# EAGLE board SparkFun Buck Regulator - AP63203-Panel (EAGLE 9.5.2), part 1 of 3
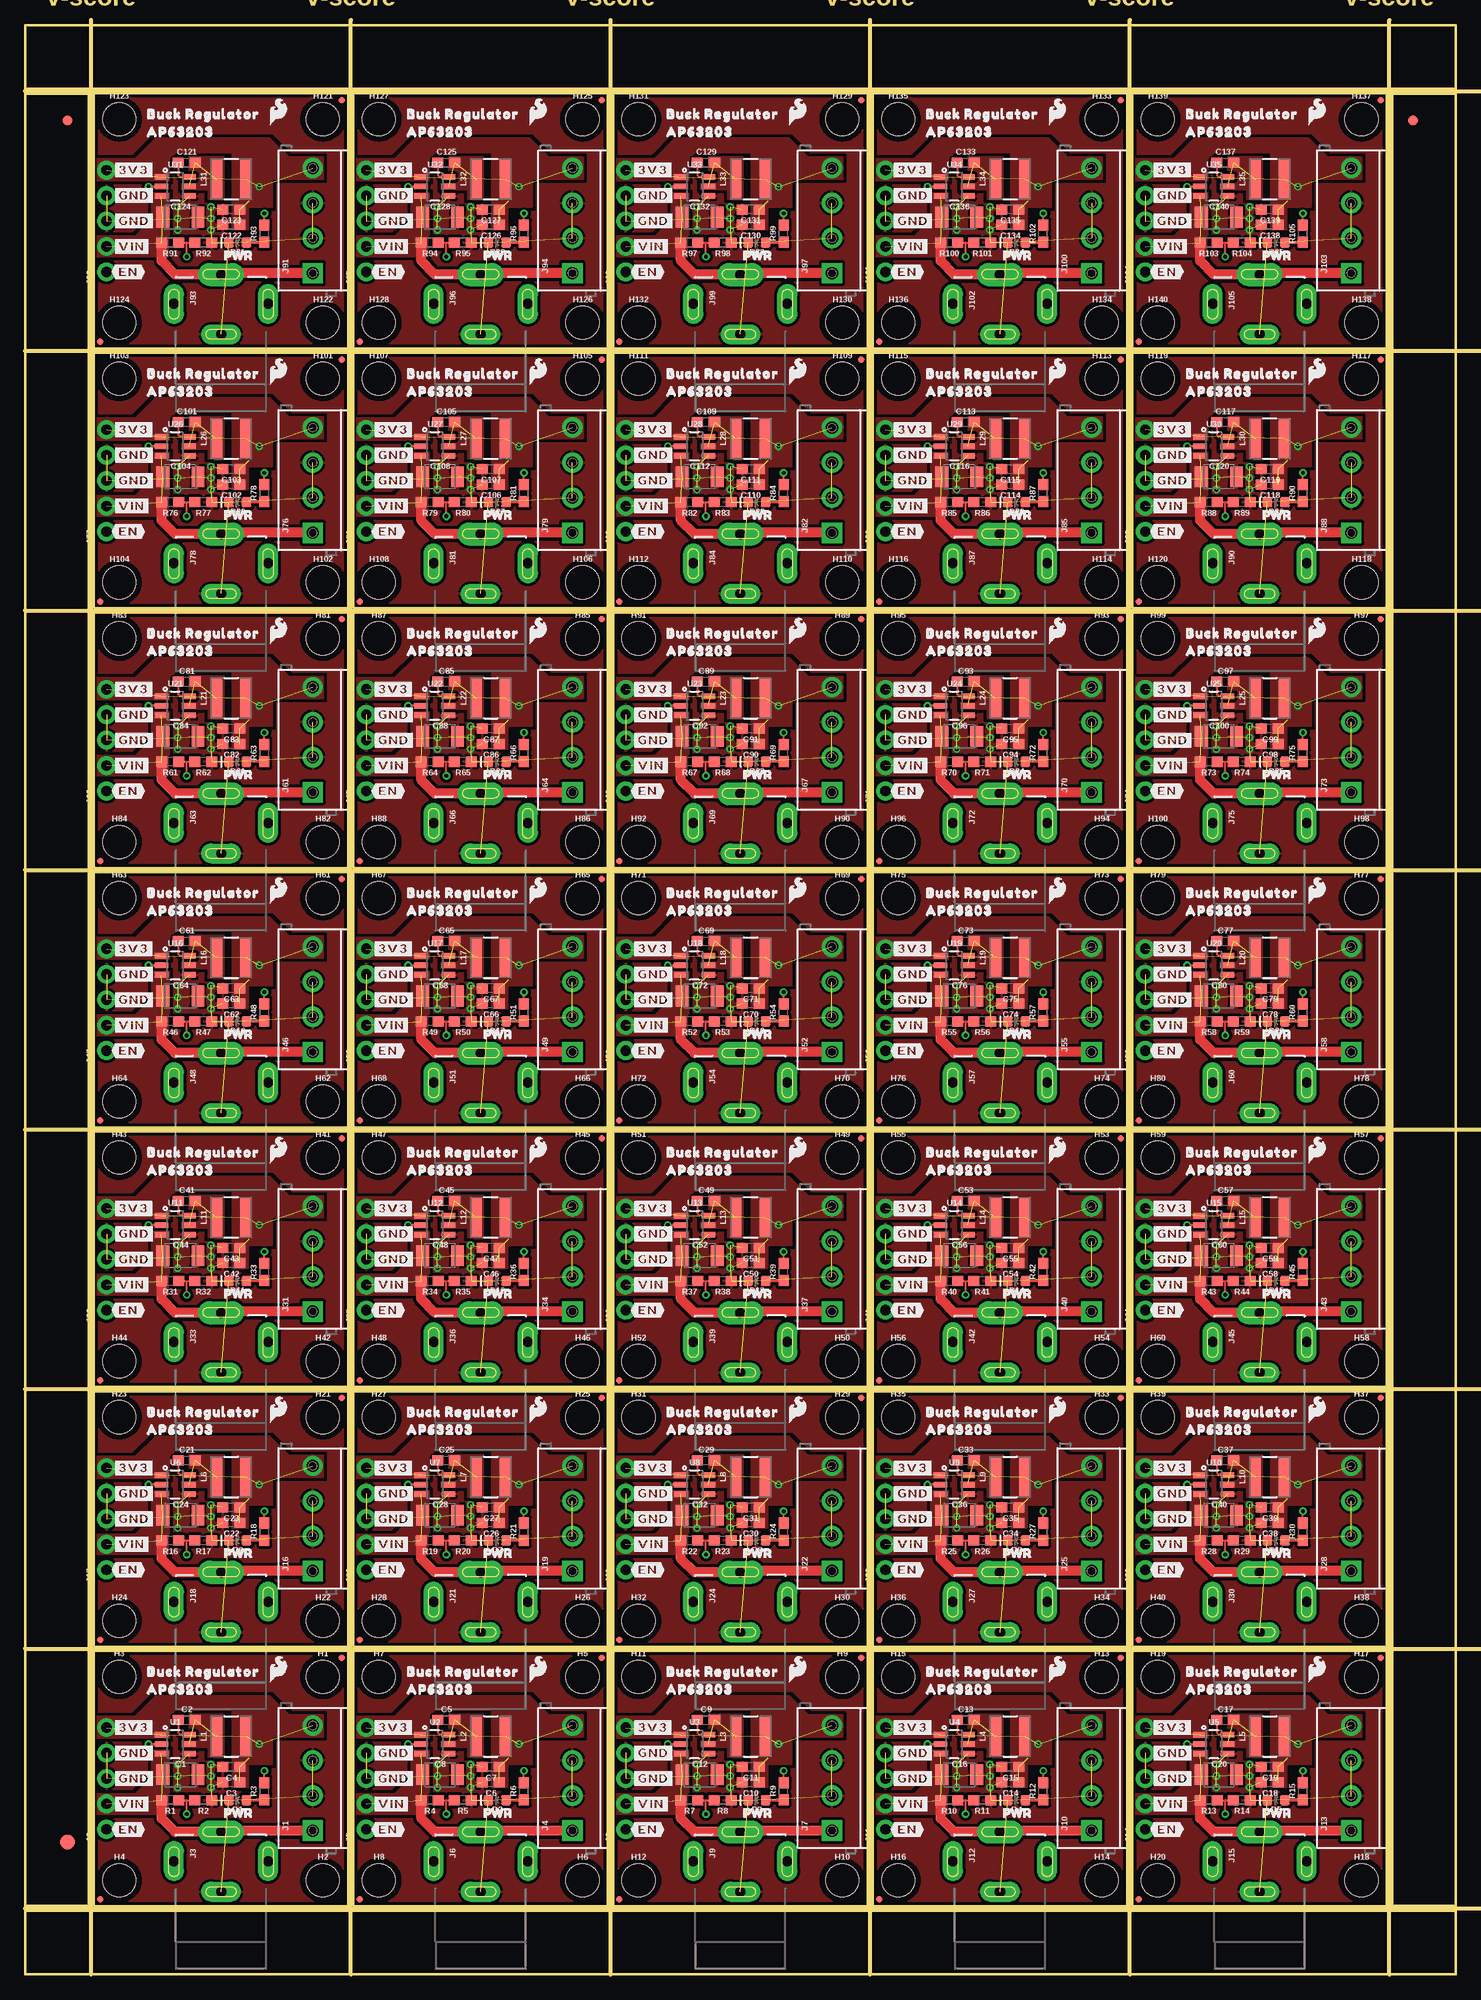
[diagram p0: board, top side]
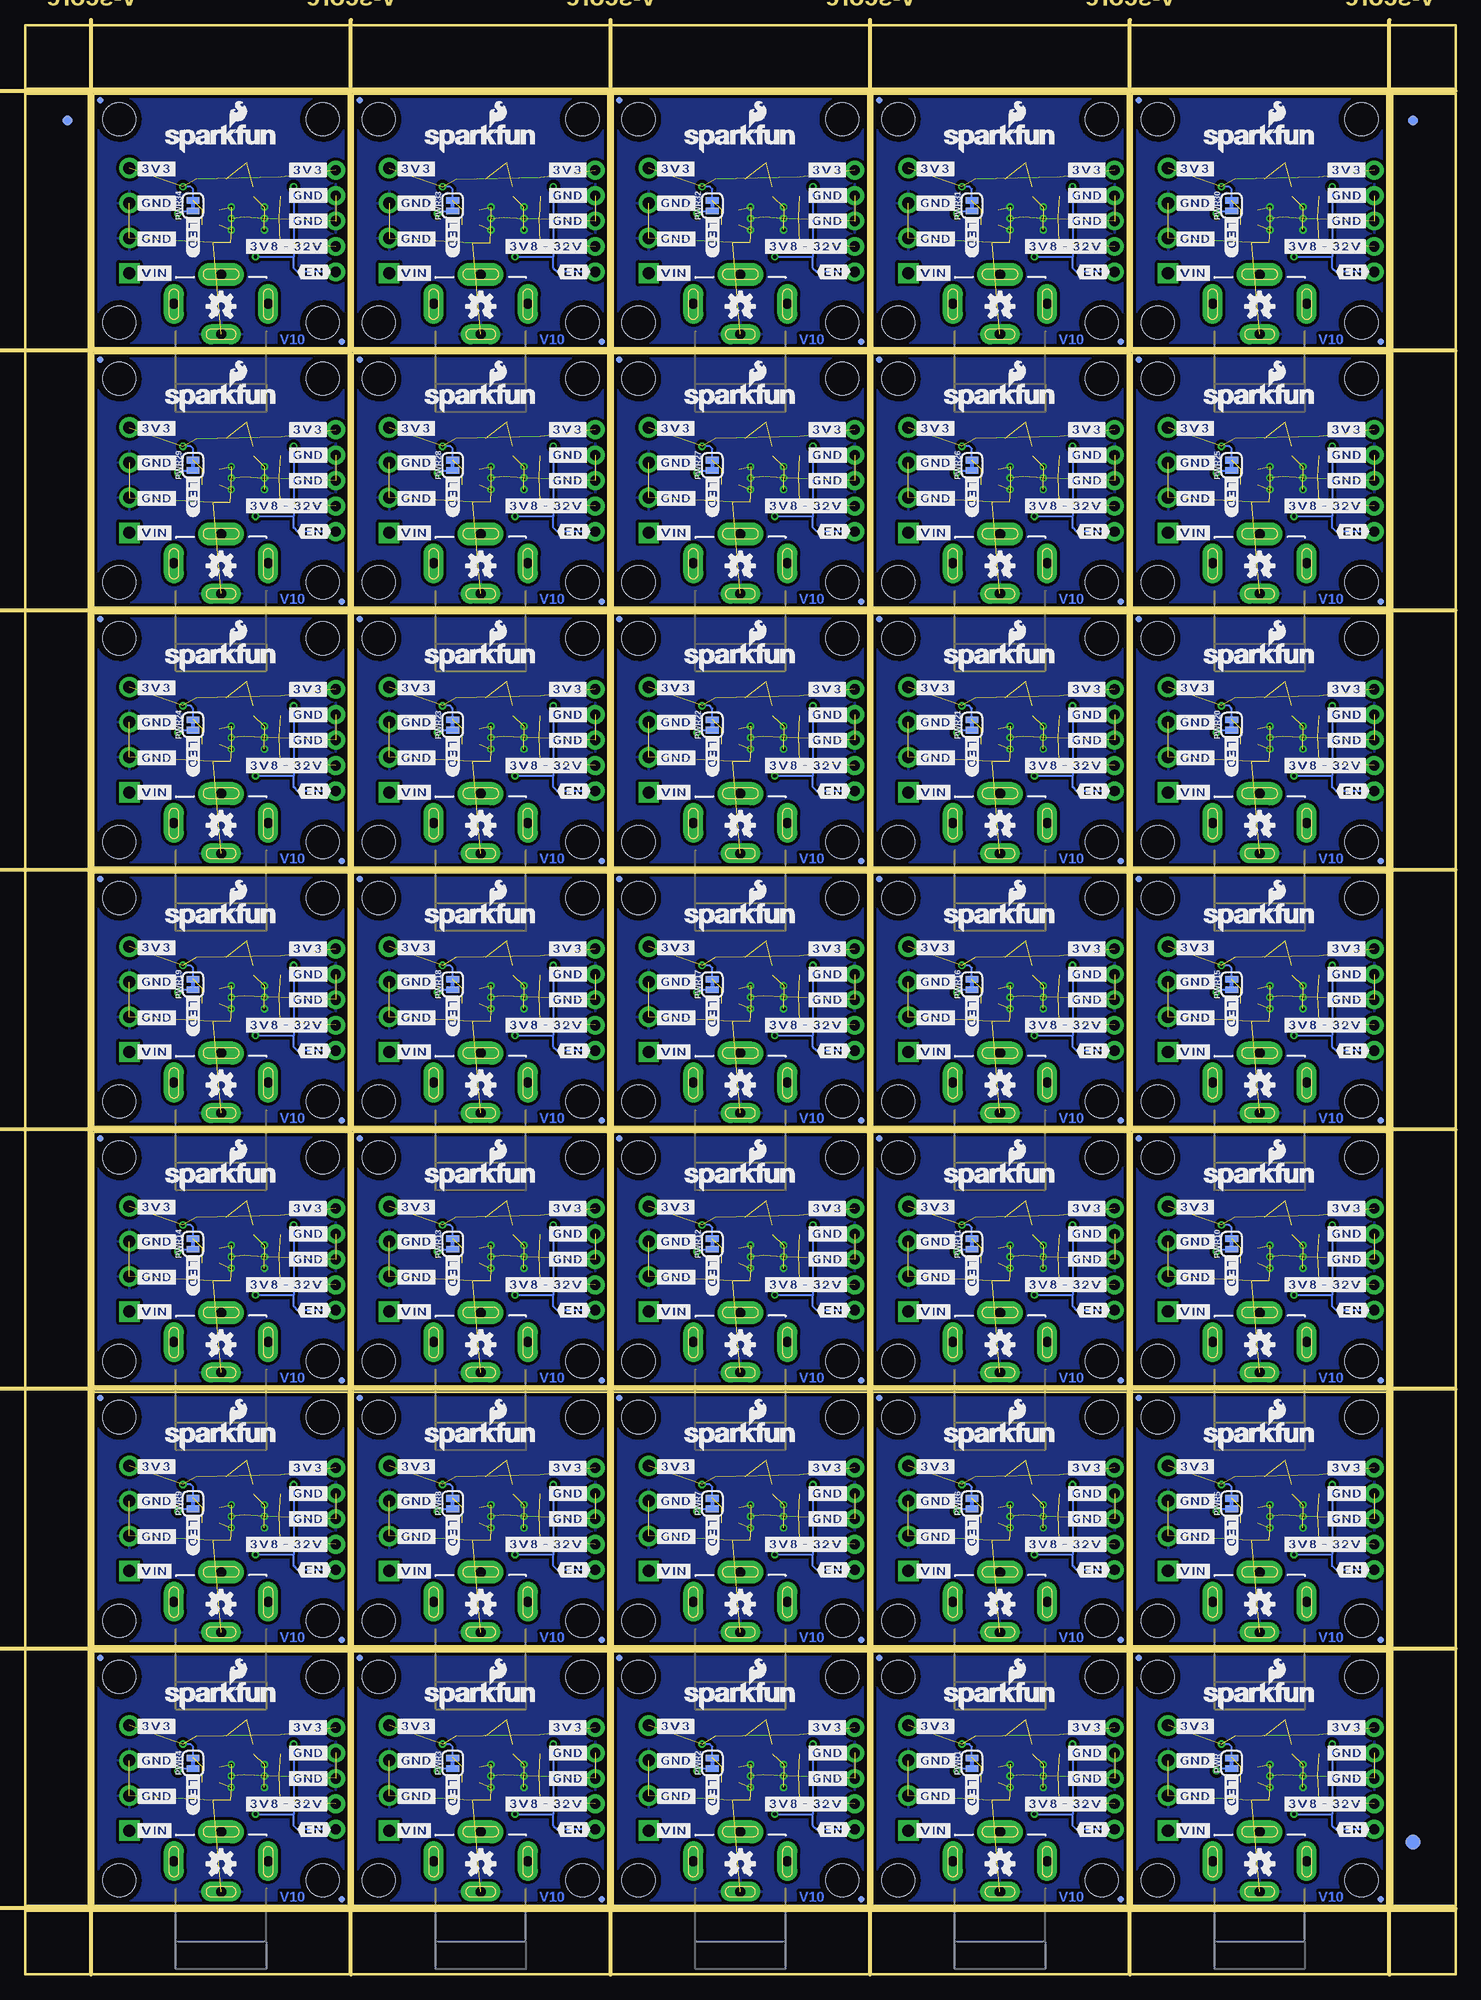
[diagram p1: board, bottom side, seen from below]

Size 142.75 x 194.56 mm. Coordinates in mm from the lower left corner, seen from the top.
Outline: 6.86,6.86 32.26,6.86 32.26,32.26 6.86,32.26 6.86,6.86
Outline: 32.77,6.86 58.17,6.86 58.17,32.26 32.77,32.26 32.77,6.86
Outline: 58.67,6.86 84.07,6.86 84.07,32.26 58.67,32.26 58.67,6.86
Outline: 84.58,6.86 109.98,6.86 109.98,32.26 84.58,32.26 84.58,6.86
Outline: 110.49,6.86 135.89,6.86 135.89,32.26 110.49,32.26 110.49,6.86
Outline: 6.86,32.77 32.26,32.77 32.26,58.17 6.86,58.17 6.86,32.77
Outline: 32.77,32.77 58.17,32.77 58.17,58.17 32.77,58.17 32.77,32.77
Outline: 58.67,32.77 84.07,32.77 84.07,58.17 58.67,58.17 58.67,32.77
Outline: 84.58,32.77 109.98,32.77 109.98,58.17 84.58,58.17 84.58,32.77
Outline: 110.49,32.77 135.89,32.77 135.89,58.17 110.49,58.17 110.49,32.77
Outline: 6.86,58.67 32.26,58.67 32.26,84.07 6.86,84.07 6.86,58.67
Outline: 32.77,58.67 58.17,58.67 58.17,84.07 32.77,84.07 32.77,58.67
Outline: 58.67,58.67 84.07,58.67 84.07,84.07 58.67,84.07 58.67,58.67
Outline: 84.58,58.67 109.98,58.67 109.98,84.07 84.58,84.07 84.58,58.67
Outline: 110.49,58.67 135.89,58.67 135.89,84.07 110.49,84.07 110.49,58.67
Outline: 6.86,84.58 32.26,84.58 32.26,109.98 6.86,109.98 6.86,84.58
Outline: 32.77,84.58 58.17,84.58 58.17,109.98 32.77,109.98 32.77,84.58
Outline: 58.67,84.58 84.07,84.58 84.07,109.98 58.67,109.98 58.67,84.58
Outline: 84.58,84.58 109.98,84.58 109.98,109.98 84.58,109.98 84.58,84.58
Outline: 110.49,84.58 135.89,84.58 135.89,109.98 110.49,109.98 110.49,84.58
Outline: 6.86,110.49 32.26,110.49 32.26,135.89 6.86,135.89 6.86,110.49
Outline: 32.77,110.49 58.17,110.49 58.17,135.89 32.77,135.89 32.77,110.49
Outline: 58.67,110.49 84.07,110.49 84.07,135.89 58.67,135.89 58.67,110.49
Outline: 84.58,110.49 109.98,110.49 109.98,135.89 84.58,135.89 84.58,110.49
Outline: 110.49,110.49 135.89,110.49 135.89,135.89 110.49,135.89 110.49,110.49
Outline: 6.86,136.4 32.26,136.4 32.26,161.8 6.86,161.8 6.86,136.4
Outline: 32.77,136.4 58.17,136.4 58.17,161.8 32.77,161.8 32.77,136.4
Outline: 58.67,136.4 84.07,136.4 84.07,161.8 58.67,161.8 58.67,136.4
Outline: 84.58,136.4 109.98,136.4 109.98,161.8 84.58,161.8 84.58,136.4
Outline: 110.49,136.4 135.89,136.4 135.89,161.8 110.49,161.8 110.49,136.4
Outline: 6.86,162.31 32.26,162.31 32.26,187.71 6.86,187.71 6.86,162.31
Outline: 32.77,162.31 58.17,162.31 58.17,187.71 32.77,187.71 32.77,162.31
Outline: 58.67,162.31 84.07,162.31 84.07,187.71 58.67,187.71 58.67,162.31
Outline: 84.58,162.31 109.98,162.31 109.98,187.71 84.58,187.71 84.58,162.31
Outline: 110.49,162.31 135.89,162.31 135.89,187.71 110.49,187.71 110.49,162.31
Outline: 0,6.35 142.75,6.35 142.75,0 0,0 0,6.35
Outline: 136.4,187.71 142.75,187.71 142.75,6.86 136.4,6.86 136.4,187.71
Outline: 0,194.56 142.75,194.56 142.75,188.21 0,188.21 0,194.56
Outline: 0,187.71 6.35,187.71 6.35,6.86 0,6.86 0,187.71
Copper layers (1*16): Top 0.035mm / dielectric 1.5mm / Bottom 0.035mm
Design rules "SparkFun Buck Regulator - AP63203": minimum track width 7mil, minimum drill 0.3mm, track to track 7mil, track to pad 7mil, pad to pad 7mil, via to via 7mil, smd to smd 7mil, copper to edge 7mil, drill to drill 7mil, minimum pad ring 7mil, minimum via ring 7mil, stop-mask expansion 3mil, vias tented up to drill 25mil, thermal gap 10mil
Milling: 14 lines

## Footprints (pad centres in the part's own frame; a part is rotated, then mirrored left to right if it is on the bottom)
1210 = smd 1.27 x 2.06: 1 -1.755,0; 2 1.755,0
0603 = smd 1.1 x 1: 1 -0.85,0; 2 0.85,0
LED-0603 = smd 1 x 1: A -0.877,0; C 0.877,0
FIDUCIAL-1X2 = smd 1 x 1: 1 0,0
FIDUCIAL-1.5X3 = smd 1.5 x 1.5: 1 0,0
FIDUCIAL-MICRO = smd 0.635 x 0.635: 1 0,0
STAND-OFF = hole 3.302: 0,0
SCREWTERMINAL-3.5MM-4 = drill 1.2 pad 2.032 square: 1 0,0 | drill 1.2 pad 2.032: 2 3.5,0; 3 7,0; 4 10.5,0
1X05_NO_SILK = drill 1.016 pad 1.88: 1 0,0; 2 2.54,0; 3 5.08,0; 4 7.62,0; 5 10.16,0
POWER_JACK_PTH_SLOT = drill 1 pad 2 long: GND 0,0; GNDBREAK -3.048,4.699; GNDBREAK1 -3.048,-4.699 | drill 1 pad 2.3 long: PWR -5.969,0
INDUCTOR_4X4MM = smd 4.089 x 1.143: P$1 0,1.473; P$2 0,-1.473
SMT-JUMPER_2_NC_TRACE_SILK = smd 0.66 x 1.27: 1 -0.521,0; 2 0.521,0
SOT23-6 = smd 0.55 x 1.35: 1 -0.95,-1.375; 2 0,-1.375; 3 0.95,-1.375; 4 0.95,1.375; 5 0,1.375; 6 -0.95,1.375

## Placement (x,y rotation side)
C1  10uF  [1210]  15.49,19.94 0 top
C2  0.1uF  [0603]  16.13,25.4 0 top
C3  22uF  [0603]  20.57,19.18 180 top
C4  22uF  [0603]  20.57,20.7 180 top
C5  0.1uF  [0603]  42.04,25.4 0 top
C6  22uF  [0603]  46.48,19.18 180 top
C7  22uF  [0603]  46.48,20.7 180 top
C8  10uF  [1210]  41.4,19.94 0 top
C9  0.1uF  [0603]  67.95,25.4 0 top
C10  22uF  [0603]  72.39,19.18 180 top
C11  22uF  [0603]  72.39,20.7 180 top
C12  10uF  [1210]  67.31,19.94 0 top
C13  0.1uF  [0603]  93.85,25.4 0 top
C14  22uF  [0603]  98.3,19.18 180 top
C15  22uF  [0603]  98.3,20.7 180 top
C16  10uF  [1210]  93.22,19.94 0 top
C17  0.1uF  [0603]  119.76,25.4 0 top
C18  22uF  [0603]  124.21,19.18 180 top
C19  22uF  [0603]  124.21,20.7 180 top
C20  10uF  [1210]  119.13,19.94 0 top
C21  0.1uF  [0603]  16.13,51.31 0 top
C22  22uF  [0603]  20.57,45.08 180 top
C23  22uF  [0603]  20.57,46.61 180 top
C24  10uF  [1210]  15.49,45.85 0 top
C25  0.1uF  [0603]  42.04,51.31 0 top
C26  22uF  [0603]  46.48,45.08 180 top
C27  22uF  [0603]  46.48,46.61 180 top
C28  10uF  [1210]  41.4,45.85 0 top
C29  0.1uF  [0603]  67.95,51.31 0 top
C30  22uF  [0603]  72.39,45.08 180 top
C31  22uF  [0603]  72.39,46.61 180 top
C32  10uF  [1210]  67.31,45.85 0 top
C33  0.1uF  [0603]  93.85,51.31 0 top
C34  22uF  [0603]  98.3,45.08 180 top
C35  22uF  [0603]  98.3,46.61 180 top
C36  10uF  [1210]  93.22,45.85 0 top
C37  0.1uF  [0603]  119.76,51.31 0 top
C38  22uF  [0603]  124.21,45.08 180 top
C39  22uF  [0603]  124.21,46.61 180 top
C40  10uF  [1210]  119.13,45.85 0 top
C41  0.1uF  [0603]  16.13,77.22 0 top
C42  22uF  [0603]  20.57,70.99 180 top
C43  22uF  [0603]  20.57,72.52 180 top
C44  10uF  [1210]  15.49,71.76 0 top
C45  0.1uF  [0603]  42.04,77.22 0 top
C46  22uF  [0603]  46.48,70.99 180 top
C47  22uF  [0603]  46.48,72.52 180 top
C48  10uF  [1210]  41.4,71.76 0 top
C49  0.1uF  [0603]  67.95,77.22 0 top
C50  22uF  [0603]  72.39,70.99 180 top
C51  22uF  [0603]  72.39,72.52 180 top
C52  10uF  [1210]  67.31,71.76 0 top
C53  0.1uF  [0603]  93.85,77.22 0 top
C54  22uF  [0603]  98.3,70.99 180 top
C55  22uF  [0603]  98.3,72.52 180 top
C56  10uF  [1210]  93.22,71.76 0 top
C57  0.1uF  [0603]  119.76,77.22 0 top
C58  22uF  [0603]  124.21,70.99 180 top
C59  22uF  [0603]  124.21,72.52 180 top
C60  10uF  [1210]  119.13,71.76 0 top
C61  0.1uF  [0603]  16.13,103.12 0 top
C62  22uF  [0603]  20.57,96.9 180 top
C63  22uF  [0603]  20.57,98.42 180 top
C64  10uF  [1210]  15.49,97.66 0 top
C65  0.1uF  [0603]  42.04,103.12 0 top
C66  22uF  [0603]  46.48,96.9 180 top
C67  22uF  [0603]  46.48,98.42 180 top
C68  10uF  [1210]  41.4,97.66 0 top
C69  0.1uF  [0603]  67.95,103.12 0 top
C70  22uF  [0603]  72.39,96.9 180 top
C71  22uF  [0603]  72.39,98.42 180 top
C72  10uF  [1210]  67.31,97.66 0 top
C73  0.1uF  [0603]  93.85,103.12 0 top
C74  22uF  [0603]  98.3,96.9 180 top
C75  22uF  [0603]  98.3,98.42 180 top
C76  10uF  [1210]  93.22,97.66 0 top
C77  0.1uF  [0603]  119.76,103.12 0 top
C78  22uF  [0603]  124.21,96.9 180 top
C79  22uF  [0603]  124.21,98.42 180 top
C80  10uF  [1210]  119.13,97.66 0 top
C81  0.1uF  [0603]  16.13,129.03 0 top
C82  22uF  [0603]  20.57,122.81 180 top
C83  22uF  [0603]  20.57,124.33 180 top
C84  10uF  [1210]  15.49,123.57 0 top
C85  0.1uF  [0603]  42.04,129.03 0 top
C86  22uF  [0603]  46.48,122.81 180 top
C87  22uF  [0603]  46.48,124.33 180 top
C88  10uF  [1210]  41.4,123.57 0 top
C89  0.1uF  [0603]  67.95,129.03 0 top
C90  22uF  [0603]  72.39,122.81 180 top
C91  22uF  [0603]  72.39,124.33 180 top
C92  10uF  [1210]  67.31,123.57 0 top
C93  0.1uF  [0603]  93.85,129.03 0 top
C94  22uF  [0603]  98.3,122.81 180 top
C95  22uF  [0603]  98.3,124.33 180 top
C96  10uF  [1210]  93.22,123.57 0 top
C97  0.1uF  [0603]  119.76,129.03 0 top
C98  22uF  [0603]  124.21,122.81 180 top
C99  22uF  [0603]  124.21,124.33 180 top
C100  10uF  [1210]  119.13,123.57 0 top
C101  0.1uF  [0603]  16.13,154.94 0 top
C102  22uF  [0603]  20.57,148.72 180 top
C103  22uF  [0603]  20.57,150.24 180 top
C104  10uF  [1210]  15.49,149.48 0 top
C105  0.1uF  [0603]  42.04,154.94 0 top
C106  22uF  [0603]  46.48,148.72 180 top
C107  22uF  [0603]  46.48,150.24 180 top
C108  10uF  [1210]  41.4,149.48 0 top
C109  0.1uF  [0603]  67.95,154.94 0 top
C110  22uF  [0603]  72.39,148.72 180 top
C111  22uF  [0603]  72.39,150.24 180 top
C112  10uF  [1210]  67.31,149.48 0 top
C113  0.1uF  [0603]  93.85,154.94 0 top
C114  22uF  [0603]  98.3,148.72 180 top
C115  22uF  [0603]  98.3,150.24 180 top
C116  10uF  [1210]  93.22,149.48 0 top
C117  0.1uF  [0603]  119.76,154.94 0 top
C118  22uF  [0603]  124.21,148.72 180 top
C119  22uF  [0603]  124.21,150.24 180 top
C120  10uF  [1210]  119.13,149.48 0 top
C121  0.1uF  [0603]  16.13,180.85 0 top
C122  22uF  [0603]  20.57,174.62 180 top
C123  22uF  [0603]  20.57,176.15 180 top
C124  10uF  [1210]  15.49,175.39 0 top
C125  0.1uF  [0603]  42.04,180.85 0 top
C126  22uF  [0603]  46.48,174.62 180 top
C127  22uF  [0603]  46.48,176.15 180 top
C128  10uF  [1210]  41.4,175.39 0 top
C129  0.1uF  [0603]  67.95,180.85 0 top
C130  22uF  [0603]  72.39,174.62 180 top
C131  22uF  [0603]  72.39,176.15 180 top
C132  10uF  [1210]  67.31,175.39 0 top
C133  0.1uF  [0603]  93.85,180.85 0 top
C134  22uF  [0603]  98.3,174.62 180 top
C135  22uF  [0603]  98.3,176.15 180 top
C136  10uF  [1210]  93.22,175.39 0 top
C137  0.1uF  [0603]  119.76,180.85 0 top
C138  22uF  [0603]  124.21,174.62 180 top
C139  22uF  [0603]  124.21,176.15 180 top
C140  10uF  [1210]  119.13,175.39 0 top
D1  RED  [LED-0603]  21.21,17.4 180 top
D2  RED  [LED-0603]  47.12,17.4 180 top
D3  RED  [LED-0603]  73.03,17.4 180 top
D4  RED  [LED-0603]  98.93,17.4 180 top
D5  RED  [LED-0603]  124.84,17.4 180 top
D6  RED  [LED-0603]  21.21,43.31 180 top
D7  RED  [LED-0603]  47.12,43.31 180 top
D8  RED  [LED-0603]  73.03,43.31 180 top
D9  RED  [LED-0603]  98.93,43.31 180 top
D10  RED  [LED-0603]  124.84,43.31 180 top
D11  RED  [LED-0603]  21.21,69.22 180 top
D12  RED  [LED-0603]  47.12,69.22 180 top
D13  RED  [LED-0603]  73.03,69.22 180 top
D14  RED  [LED-0603]  98.93,69.22 180 top
D15  RED  [LED-0603]  124.84,69.22 180 top
D16  RED  [LED-0603]  21.21,95.12 180 top
D17  RED  [LED-0603]  47.12,95.12 180 top
D18  RED  [LED-0603]  73.03,95.12 180 top
D19  RED  [LED-0603]  98.93,95.12 180 top
D20  RED  [LED-0603]  124.84,95.12 180 top
D21  RED  [LED-0603]  21.21,121.03 180 top
D22  RED  [LED-0603]  47.12,121.03 180 top
D23  RED  [LED-0603]  73.03,121.03 180 top
D24  RED  [LED-0603]  98.93,121.03 180 top
D25  RED  [LED-0603]  124.84,121.03 180 top
D26  RED  [LED-0603]  21.21,146.94 180 top
D27  RED  [LED-0603]  47.12,146.94 180 top
D28  RED  [LED-0603]  73.03,146.94 180 top
D29  RED  [LED-0603]  98.93,146.94 180 top
D30  RED  [LED-0603]  124.84,146.94 180 top
D31  RED  [LED-0603]  21.21,172.85 180 top
D32  RED  [LED-0603]  47.12,172.85 180 top
D33  RED  [LED-0603]  73.03,172.85 180 top
D34  RED  [LED-0603]  98.93,172.85 180 top
D35  RED  [LED-0603]  124.84,172.85 180 top
E$1  [FIDUCIAL-1X2]  4.23,185.04 0 top
E$2  [FIDUCIAL-1X2]  4.23,185.04 0 bottom
E$3  [FIDUCIAL-1X2]  138.51,185.04 0 top
E$4  [FIDUCIAL-1X2]  138.51,185.04 0 bottom
E$5  [FIDUCIAL-1.5X3]  4.23,13.21 0 top
E$6  [FIDUCIAL-1.5X3]  4.23,13.21 0 bottom
FD1  FIDUCIALUFIDUCIAL  [FIDUCIAL-MICRO]  7.49,7.49 0 top
FD2  FIDUCIALUFIDUCIAL  [FIDUCIAL-MICRO]  31.62,31.62 0 top
FD3  FIDUCIALUFIDUCIAL  [FIDUCIAL-MICRO]  7.49,7.49 0 bottom
FD4  FIDUCIALUFIDUCIAL  [FIDUCIAL-MICRO]  31.62,31.62 0 bottom
FD5  FIDUCIALUFIDUCIAL  [FIDUCIAL-MICRO]  33.4,7.49 0 top
FD6  FIDUCIALUFIDUCIAL  [FIDUCIAL-MICRO]  57.53,31.62 0 top
FD7  FIDUCIALUFIDUCIAL  [FIDUCIAL-MICRO]  33.4,7.49 0 bottom
FD8  FIDUCIALUFIDUCIAL  [FIDUCIAL-MICRO]  57.53,31.62 0 bottom
FD9  FIDUCIALUFIDUCIAL  [FIDUCIAL-MICRO]  59.31,7.49 0 top
FD10  FIDUCIALUFIDUCIAL  [FIDUCIAL-MICRO]  83.44,31.62 0 top
FD11  FIDUCIALUFIDUCIAL  [FIDUCIAL-MICRO]  59.31,7.49 0 bottom
FD12  FIDUCIALUFIDUCIAL  [FIDUCIAL-MICRO]  83.44,31.62 0 bottom
FD13  FIDUCIALUFIDUCIAL  [FIDUCIAL-MICRO]  85.22,7.49 0 top
FD14  FIDUCIALUFIDUCIAL  [FIDUCIAL-MICRO]  109.35,31.62 0 top
FD15  FIDUCIALUFIDUCIAL  [FIDUCIAL-MICRO]  85.22,7.49 0 bottom
FD16  FIDUCIALUFIDUCIAL  [FIDUCIAL-MICRO]  109.35,31.62 0 bottom
FD17  FIDUCIALUFIDUCIAL  [FIDUCIAL-MICRO]  111.12,7.49 0 top
FD18  FIDUCIALUFIDUCIAL  [FIDUCIAL-MICRO]  135.25,31.62 0 top
FD19  FIDUCIALUFIDUCIAL  [FIDUCIAL-MICRO]  111.12,7.49 0 bottom
FD20  FIDUCIALUFIDUCIAL  [FIDUCIAL-MICRO]  135.25,31.62 0 bottom
FD21  FIDUCIALUFIDUCIAL  [FIDUCIAL-MICRO]  7.49,33.4 0 top
FD22  FIDUCIALUFIDUCIAL  [FIDUCIAL-MICRO]  31.62,57.53 0 top
FD23  FIDUCIALUFIDUCIAL  [FIDUCIAL-MICRO]  7.49,33.4 0 bottom
FD24  FIDUCIALUFIDUCIAL  [FIDUCIAL-MICRO]  31.62,57.53 0 bottom
FD25  FIDUCIALUFIDUCIAL  [FIDUCIAL-MICRO]  33.4,33.4 0 top
FD26  FIDUCIALUFIDUCIAL  [FIDUCIAL-MICRO]  57.53,57.53 0 top
FD27  FIDUCIALUFIDUCIAL  [FIDUCIAL-MICRO]  33.4,33.4 0 bottom
FD28  FIDUCIALUFIDUCIAL  [FIDUCIAL-MICRO]  57.53,57.53 0 bottom
FD29  FIDUCIALUFIDUCIAL  [FIDUCIAL-MICRO]  59.31,33.4 0 top
FD30  FIDUCIALUFIDUCIAL  [FIDUCIAL-MICRO]  83.44,57.53 0 top
FD31  FIDUCIALUFIDUCIAL  [FIDUCIAL-MICRO]  59.31,33.4 0 bottom
FD32  FIDUCIALUFIDUCIAL  [FIDUCIAL-MICRO]  83.44,57.53 0 bottom
FD33  FIDUCIALUFIDUCIAL  [FIDUCIAL-MICRO]  85.22,33.4 0 top
FD34  FIDUCIALUFIDUCIAL  [FIDUCIAL-MICRO]  109.35,57.53 0 top
FD35  FIDUCIALUFIDUCIAL  [FIDUCIAL-MICRO]  85.22,33.4 0 bottom
FD36  FIDUCIALUFIDUCIAL  [FIDUCIAL-MICRO]  109.35,57.53 0 bottom
FD37  FIDUCIALUFIDUCIAL  [FIDUCIAL-MICRO]  111.12,33.4 0 top
FD38  FIDUCIALUFIDUCIAL  [FIDUCIAL-MICRO]  135.25,57.53 0 top
FD39  FIDUCIALUFIDUCIAL  [FIDUCIAL-MICRO]  111.12,33.4 0 bottom
FD40  FIDUCIALUFIDUCIAL  [FIDUCIAL-MICRO]  135.25,57.53 0 bottom
FD41  FIDUCIALUFIDUCIAL  [FIDUCIAL-MICRO]  7.49,59.31 0 top
FD42  FIDUCIALUFIDUCIAL  [FIDUCIAL-MICRO]  31.62,83.44 0 top
FD43  FIDUCIALUFIDUCIAL  [FIDUCIAL-MICRO]  7.49,59.31 0 bottom
FD44  FIDUCIALUFIDUCIAL  [FIDUCIAL-MICRO]  31.62,83.44 0 bottom
FD45  FIDUCIALUFIDUCIAL  [FIDUCIAL-MICRO]  33.4,59.31 0 top
FD46  FIDUCIALUFIDUCIAL  [FIDUCIAL-MICRO]  57.53,83.44 0 top
FD47  FIDUCIALUFIDUCIAL  [FIDUCIAL-MICRO]  33.4,59.31 0 bottom
FD48  FIDUCIALUFIDUCIAL  [FIDUCIAL-MICRO]  57.53,83.44 0 bottom
FD49  FIDUCIALUFIDUCIAL  [FIDUCIAL-MICRO]  59.31,59.31 0 top
FD50  FIDUCIALUFIDUCIAL  [FIDUCIAL-MICRO]  83.44,83.44 0 top
FD51  FIDUCIALUFIDUCIAL  [FIDUCIAL-MICRO]  59.31,59.31 0 bottom
FD52  FIDUCIALUFIDUCIAL  [FIDUCIAL-MICRO]  83.44,83.44 0 bottom
FD53  FIDUCIALUFIDUCIAL  [FIDUCIAL-MICRO]  85.22,59.31 0 top
FD54  FIDUCIALUFIDUCIAL  [FIDUCIAL-MICRO]  109.35,83.44 0 top
FD55  FIDUCIALUFIDUCIAL  [FIDUCIAL-MICRO]  85.22,59.31 0 bottom
FD56  FIDUCIALUFIDUCIAL  [FIDUCIAL-MICRO]  109.35,83.44 0 bottom
FD57  FIDUCIALUFIDUCIAL  [FIDUCIAL-MICRO]  111.12,59.31 0 top
FD58  FIDUCIALUFIDUCIAL  [FIDUCIAL-MICRO]  135.25,83.44 0 top
FD59  FIDUCIALUFIDUCIAL  [FIDUCIAL-MICRO]  111.12,59.31 0 bottom
FD60  FIDUCIALUFIDUCIAL  [FIDUCIAL-MICRO]  135.25,83.44 0 bottom
FD61  FIDUCIALUFIDUCIAL  [FIDUCIAL-MICRO]  7.49,85.22 0 top
FD62  FIDUCIALUFIDUCIAL  [FIDUCIAL-MICRO]  31.62,109.35 0 top
FD63  FIDUCIALUFIDUCIAL  [FIDUCIAL-MICRO]  7.49,85.22 0 bottom
FD64  FIDUCIALUFIDUCIAL  [FIDUCIAL-MICRO]  31.62,109.35 0 bottom
FD65  FIDUCIALUFIDUCIAL  [FIDUCIAL-MICRO]  33.4,85.22 0 top
FD66  FIDUCIALUFIDUCIAL  [FIDUCIAL-MICRO]  57.53,109.35 0 top
FD67  FIDUCIALUFIDUCIAL  [FIDUCIAL-MICRO]  33.4,85.22 0 bottom
FD68  FIDUCIALUFIDUCIAL  [FIDUCIAL-MICRO]  57.53,109.35 0 bottom
FD69  FIDUCIALUFIDUCIAL  [FIDUCIAL-MICRO]  59.31,85.22 0 top
FD70  FIDUCIALUFIDUCIAL  [FIDUCIAL-MICRO]  83.44,109.35 0 top
FD71  FIDUCIALUFIDUCIAL  [FIDUCIAL-MICRO]  59.31,85.22 0 bottom
FD72  FIDUCIALUFIDUCIAL  [FIDUCIAL-MICRO]  83.44,109.35 0 bottom
FD73  FIDUCIALUFIDUCIAL  [FIDUCIAL-MICRO]  85.22,85.22 0 top
FD74  FIDUCIALUFIDUCIAL  [FIDUCIAL-MICRO]  109.35,109.35 0 top
FD75  FIDUCIALUFIDUCIAL  [FIDUCIAL-MICRO]  85.22,85.22 0 bottom
FD76  FIDUCIALUFIDUCIAL  [FIDUCIAL-MICRO]  109.35,109.35 0 bottom
FD77  FIDUCIALUFIDUCIAL  [FIDUCIAL-MICRO]  111.12,85.22 0 top
FD78  FIDUCIALUFIDUCIAL  [FIDUCIAL-MICRO]  135.25,109.35 0 top
FD79  FIDUCIALUFIDUCIAL  [FIDUCIAL-MICRO]  111.12,85.22 0 bottom
FD80  FIDUCIALUFIDUCIAL  [FIDUCIAL-MICRO]  135.25,109.35 0 bottom
FD81  FIDUCIALUFIDUCIAL  [FIDUCIAL-MICRO]  7.49,111.12 0 top
FD82  FIDUCIALUFIDUCIAL  [FIDUCIAL-MICRO]  31.62,135.25 0 top
FD83  FIDUCIALUFIDUCIAL  [FIDUCIAL-MICRO]  7.49,111.12 0 bottom
FD84  FIDUCIALUFIDUCIAL  [FIDUCIAL-MICRO]  31.62,135.25 0 bottom
FD85  FIDUCIALUFIDUCIAL  [FIDUCIAL-MICRO]  33.4,111.12 0 top
FD86  FIDUCIALUFIDUCIAL  [FIDUCIAL-MICRO]  57.53,135.25 0 top
FD87  FIDUCIALUFIDUCIAL  [FIDUCIAL-MICRO]  33.4,111.12 0 bottom
FD88  FIDUCIALUFIDUCIAL  [FIDUCIAL-MICRO]  57.53,135.25 0 bottom
FD89  FIDUCIALUFIDUCIAL  [FIDUCIAL-MICRO]  59.31,111.12 0 top
FD90  FIDUCIALUFIDUCIAL  [FIDUCIAL-MICRO]  83.44,135.25 0 top
FD91  FIDUCIALUFIDUCIAL  [FIDUCIAL-MICRO]  59.31,111.12 0 bottom
FD92  FIDUCIALUFIDUCIAL  [FIDUCIAL-MICRO]  83.44,135.25 0 bottom
FD93  FIDUCIALUFIDUCIAL  [FIDUCIAL-MICRO]  85.22,111.12 0 top
FD94  FIDUCIALUFIDUCIAL  [FIDUCIAL-MICRO]  109.35,135.25 0 top
FD95  FIDUCIALUFIDUCIAL  [FIDUCIAL-MICRO]  85.22,111.12 0 bottom
FD96  FIDUCIALUFIDUCIAL  [FIDUCIAL-MICRO]  109.35,135.25 0 bottom
FD97  FIDUCIALUFIDUCIAL  [FIDUCIAL-MICRO]  111.12,111.12 0 top
FD98  FIDUCIALUFIDUCIAL  [FIDUCIAL-MICRO]  135.25,135.25 0 top
FD99  FIDUCIALUFIDUCIAL  [FIDUCIAL-MICRO]  111.12,111.12 0 bottom
FD100  FIDUCIALUFIDUCIAL  [FIDUCIAL-MICRO]  135.25,135.25 0 bottom
FD101  FIDUCIALUFIDUCIAL  [FIDUCIAL-MICRO]  7.49,137.03 0 top
FD102  FIDUCIALUFIDUCIAL  [FIDUCIAL-MICRO]  31.62,161.16 0 top
FD103  FIDUCIALUFIDUCIAL  [FIDUCIAL-MICRO]  7.49,137.03 0 bottom
FD104  FIDUCIALUFIDUCIAL  [FIDUCIAL-MICRO]  31.62,161.16 0 bottom
FD105  FIDUCIALUFIDUCIAL  [FIDUCIAL-MICRO]  33.4,137.03 0 top
FD106  FIDUCIALUFIDUCIAL  [FIDUCIAL-MICRO]  57.53,161.16 0 top
FD107  FIDUCIALUFIDUCIAL  [FIDUCIAL-MICRO]  33.4,137.03 0 bottom
FD108  FIDUCIALUFIDUCIAL  [FIDUCIAL-MICRO]  57.53,161.16 0 bottom
FD109  FIDUCIALUFIDUCIAL  [FIDUCIAL-MICRO]  59.31,137.03 0 top
FD110  FIDUCIALUFIDUCIAL  [FIDUCIAL-MICRO]  83.44,161.16 0 top
FD111  FIDUCIALUFIDUCIAL  [FIDUCIAL-MICRO]  59.31,137.03 0 bottom
FD112  FIDUCIALUFIDUCIAL  [FIDUCIAL-MICRO]  83.44,161.16 0 bottom
FD113  FIDUCIALUFIDUCIAL  [FIDUCIAL-MICRO]  85.22,137.03 0 top
FD114  FIDUCIALUFIDUCIAL  [FIDUCIAL-MICRO]  109.35,161.16 0 top
FD115  FIDUCIALUFIDUCIAL  [FIDUCIAL-MICRO]  85.22,137.03 0 bottom
FD116  FIDUCIALUFIDUCIAL  [FIDUCIAL-MICRO]  109.35,161.16 0 bottom
FD117  FIDUCIALUFIDUCIAL  [FIDUCIAL-MICRO]  111.12,137.03 0 top
FD118  FIDUCIALUFIDUCIAL  [FIDUCIAL-MICRO]  135.25,161.16 0 top
FD119  FIDUCIALUFIDUCIAL  [FIDUCIAL-MICRO]  111.12,137.03 0 bottom
FD120  FIDUCIALUFIDUCIAL  [FIDUCIAL-MICRO]  135.25,161.16 0 bottom
FD121  FIDUCIALUFIDUCIAL  [FIDUCIAL-MICRO]  7.49,162.94 0 top
FD122  FIDUCIALUFIDUCIAL  [FIDUCIAL-MICRO]  31.62,187.07 0 top
FD123  FIDUCIALUFIDUCIAL  [FIDUCIAL-MICRO]  7.49,162.94 0 bottom
FD124  FIDUCIALUFIDUCIAL  [FIDUCIAL-MICRO]  31.62,187.07 0 bottom
FD125  FIDUCIALUFIDUCIAL  [FIDUCIAL-MICRO]  33.4,162.94 0 top
FD126  FIDUCIALUFIDUCIAL  [FIDUCIAL-MICRO]  57.53,187.07 0 top
FD127  FIDUCIALUFIDUCIAL  [FIDUCIAL-MICRO]  33.4,162.94 0 bottom
FD128  FIDUCIALUFIDUCIAL  [FIDUCIAL-MICRO]  57.53,187.07 0 bottom
FD129  FIDUCIALUFIDUCIAL  [FIDUCIAL-MICRO]  59.31,162.94 0 top
FD130  FIDUCIALUFIDUCIAL  [FIDUCIAL-MICRO]  83.44,187.07 0 top
FD131  FIDUCIALUFIDUCIAL  [FIDUCIAL-MICRO]  59.31,162.94 0 bottom
FD132  FIDUCIALUFIDUCIAL  [FIDUCIAL-MICRO]  83.44,187.07 0 bottom
FD133  FIDUCIALUFIDUCIAL  [FIDUCIAL-MICRO]  85.22,162.94 0 top
FD134  FIDUCIALUFIDUCIAL  [FIDUCIAL-MICRO]  109.35,187.07 0 top
FD135  FIDUCIALUFIDUCIAL  [FIDUCIAL-MICRO]  85.22,162.94 0 bottom
FD136  FIDUCIALUFIDUCIAL  [FIDUCIAL-MICRO]  109.35,187.07 0 bottom
FD137  FIDUCIALUFIDUCIAL  [FIDUCIAL-MICRO]  111.12,162.94 0 top
FD138  FIDUCIALUFIDUCIAL  [FIDUCIAL-MICRO]  135.25,187.07 0 top
FD139  FIDUCIALUFIDUCIAL  [FIDUCIAL-MICRO]  111.12,162.94 0 bottom
FD140  FIDUCIALUFIDUCIAL  [FIDUCIAL-MICRO]  135.25,187.07 0 bottom
H1  STAND-OFF  [STAND-OFF]  29.72,29.72 0 top
H2  STAND-OFF  [STAND-OFF]  29.72,9.4 0 top
H3  STAND-OFF  [STAND-OFF]  9.4,29.72 0 top
H4  STAND-OFF  [STAND-OFF]  9.4,9.4 0 top
H5  STAND-OFF  [STAND-OFF]  55.63,29.72 0 top
H6  STAND-OFF  [STAND-OFF]  55.63,9.4 0 top
H7  STAND-OFF  [STAND-OFF]  35.31,29.72 0 top
H8  STAND-OFF  [STAND-OFF]  35.31,9.4 0 top
H9  STAND-OFF  [STAND-OFF]  81.53,29.72 0 top
H10  STAND-OFF  [STAND-OFF]  81.53,9.4 0 top
H11  STAND-OFF  [STAND-OFF]  61.21,29.72 0 top
H12  STAND-OFF  [STAND-OFF]  61.21,9.4 0 top
H13  STAND-OFF  [STAND-OFF]  107.44,29.72 0 top
H14  STAND-OFF  [STAND-OFF]  107.44,9.4 0 top
H15  STAND-OFF  [STAND-OFF]  87.12,29.72 0 top
H16  STAND-OFF  [STAND-OFF]  87.12,9.4 0 top
H17  STAND-OFF  [STAND-OFF]  133.35,29.72 0 top
H18  STAND-OFF  [STAND-OFF]  133.35,9.4 0 top
H19  STAND-OFF  [STAND-OFF]  113.03,29.72 0 top
H20  STAND-OFF  [STAND-OFF]  113.03,9.4 0 top
H21  STAND-OFF  [STAND-OFF]  29.72,55.63 0 top
H22  STAND-OFF  [STAND-OFF]  29.72,35.31 0 top
H23  STAND-OFF  [STAND-OFF]  9.4,55.63 0 top
H24  STAND-OFF  [STAND-OFF]  9.4,35.31 0 top
H25  STAND-OFF  [STAND-OFF]  55.63,55.63 0 top
H26  STAND-OFF  [STAND-OFF]  55.63,35.31 0 top
H27  STAND-OFF  [STAND-OFF]  35.31,55.63 0 top
H28  STAND-OFF  [STAND-OFF]  35.31,35.31 0 top
H29  STAND-OFF  [STAND-OFF]  81.53,55.63 0 top
H30  STAND-OFF  [STAND-OFF]  81.53,35.31 0 top
H31  STAND-OFF  [STAND-OFF]  61.21,55.63 0 top
H32  STAND-OFF  [STAND-OFF]  61.21,35.31 0 top
H33  STAND-OFF  [STAND-OFF]  107.44,55.63 0 top
H34  STAND-OFF  [STAND-OFF]  107.44,35.31 0 top
H35  STAND-OFF  [STAND-OFF]  87.12,55.63 0 top
H36  STAND-OFF  [STAND-OFF]  87.12,35.31 0 top
H37  STAND-OFF  [STAND-OFF]  133.35,55.63 0 top
H38  STAND-OFF  [STAND-OFF]  133.35,35.31 0 top
H39  STAND-OFF  [STAND-OFF]  113.03,55.63 0 top
H40  STAND-OFF  [STAND-OFF]  113.03,35.31 0 top
H41  STAND-OFF  [STAND-OFF]  29.72,81.53 0 top
H42  STAND-OFF  [STAND-OFF]  29.72,61.21 0 top
H43  STAND-OFF  [STAND-OFF]  9.4,81.53 0 top
H44  STAND-OFF  [STAND-OFF]  9.4,61.21 0 top
H45  STAND-OFF  [STAND-OFF]  55.63,81.53 0 top
H46  STAND-OFF  [STAND-OFF]  55.63,61.21 0 top
H47  STAND-OFF  [STAND-OFF]  35.31,81.53 0 top
H48  STAND-OFF  [STAND-OFF]  35.31,61.21 0 top
H49  STAND-OFF  [STAND-OFF]  81.53,81.53 0 top
H50  STAND-OFF  [STAND-OFF]  81.53,61.21 0 top
H51  STAND-OFF  [STAND-OFF]  61.21,81.53 0 top
H52  STAND-OFF  [STAND-OFF]  61.21,61.21 0 top
H53  STAND-OFF  [STAND-OFF]  107.44,81.53 0 top
H54  STAND-OFF  [STAND-OFF]  107.44,61.21 0 top
H55  STAND-OFF  [STAND-OFF]  87.12,81.53 0 top
H56  STAND-OFF  [STAND-OFF]  87.12,61.21 0 top
H57  STAND-OFF  [STAND-OFF]  133.35,81.53 0 top
H58  STAND-OFF  [STAND-OFF]  133.35,61.21 0 top
H59  STAND-OFF  [STAND-OFF]  113.03,81.53 0 top
H60  STAND-OFF  [STAND-OFF]  113.03,61.21 0 top
H61  STAND-OFF  [STAND-OFF]  29.72,107.44 0 top
H62  STAND-OFF  [STAND-OFF]  29.72,87.12 0 top
H63  STAND-OFF  [STAND-OFF]  9.4,107.44 0 top
H64  STAND-OFF  [STAND-OFF]  9.4,87.12 0 top
H65  STAND-OFF  [STAND-OFF]  55.63,107.44 0 top
H66  STAND-OFF  [STAND-OFF]  55.63,87.12 0 top
H67  STAND-OFF  [STAND-OFF]  35.31,107.44 0 top
H68  STAND-OFF  [STAND-OFF]  35.31,87.12 0 top
H69  STAND-OFF  [STAND-OFF]  81.53,107.44 0 top
H70  STAND-OFF  [STAND-OFF]  81.53,87.12 0 top
H71  STAND-OFF  [STAND-OFF]  61.21,107.44 0 top
H72  STAND-OFF  [STAND-OFF]  61.21,87.12 0 top
H73  STAND-OFF  [STAND-OFF]  107.44,107.44 0 top
H74  STAND-OFF  [STAND-OFF]  107.44,87.12 0 top
H75  STAND-OFF  [STAND-OFF]  87.12,107.44 0 top
H76  STAND-OFF  [STAND-OFF]  87.12,87.12 0 top
H77  STAND-OFF  [STAND-OFF]  133.35,107.44 0 top
H78  STAND-OFF  [STAND-OFF]  133.35,87.12 0 top
H79  STAND-OFF  [STAND-OFF]  113.03,107.44 0 top
H80  STAND-OFF  [STAND-OFF]  113.03,87.12 0 top
H81  STAND-OFF  [STAND-OFF]  29.72,133.35 0 top
H82  STAND-OFF  [STAND-OFF]  29.72,113.03 0 top
H83  STAND-OFF  [STAND-OFF]  9.4,133.35 0 top
H84  STAND-OFF  [STAND-OFF]  9.4,113.03 0 top
H85  STAND-OFF  [STAND-OFF]  55.63,133.35 0 top
H86  STAND-OFF  [STAND-OFF]  55.63,113.03 0 top
H87  STAND-OFF  [STAND-OFF]  35.31,133.35 0 top
H88  STAND-OFF  [STAND-OFF]  35.31,113.03 0 top
H89  STAND-OFF  [STAND-OFF]  81.53,133.35 0 top
H90  STAND-OFF  [STAND-OFF]  81.53,113.03 0 top
H91  STAND-OFF  [STAND-OFF]  61.21,133.35 0 top
H92  STAND-OFF  [STAND-OFF]  61.21,113.03 0 top
H93  STAND-OFF  [STAND-OFF]  107.44,133.35 0 top
H94  STAND-OFF  [STAND-OFF]  107.44,113.03 0 top
H95  STAND-OFF  [STAND-OFF]  87.12,133.35 0 top
H96  STAND-OFF  [STAND-OFF]  87.12,113.03 0 top
H97  STAND-OFF  [STAND-OFF]  133.35,133.35 0 top
H98  STAND-OFF  [STAND-OFF]  133.35,113.03 0 top
H99  STAND-OFF  [STAND-OFF]  113.03,133.35 0 top
H100  STAND-OFF  [STAND-OFF]  113.03,113.03 0 top
H101  STAND-OFF  [STAND-OFF]  29.72,159.26 0 top
H102  STAND-OFF  [STAND-OFF]  29.72,138.94 0 top
H103  STAND-OFF  [STAND-OFF]  9.4,159.26 0 top
H104  STAND-OFF  [STAND-OFF]  9.4,138.94 0 top
H105  STAND-OFF  [STAND-OFF]  55.63,159.26 0 top
H106  STAND-OFF  [STAND-OFF]  55.63,138.94 0 top
H107  STAND-OFF  [STAND-OFF]  35.31,159.26 0 top
H108  STAND-OFF  [STAND-OFF]  35.31,138.94 0 top
H109  STAND-OFF  [STAND-OFF]  81.53,159.26 0 top
H110  STAND-OFF  [STAND-OFF]  81.53,138.94 0 top
H111  STAND-OFF  [STAND-OFF]  61.21,159.26 0 top
H112  STAND-OFF  [STAND-OFF]  61.21,138.94 0 top
H113  STAND-OFF  [STAND-OFF]  107.44,159.26 0 top
H114  STAND-OFF  [STAND-OFF]  107.44,138.94 0 top
H115  STAND-OFF  [STAND-OFF]  87.12,159.26 0 top
H116  STAND-OFF  [STAND-OFF]  87.12,138.94 0 top
H117  STAND-OFF  [STAND-OFF]  133.35,159.26 0 top
H118  STAND-OFF  [STAND-OFF]  133.35,138.94 0 top
H119  STAND-OFF  [STAND-OFF]  113.03,159.26 0 top
H120  STAND-OFF  [STAND-OFF]  113.03,138.94 0 top
H121  STAND-OFF  [STAND-OFF]  29.72,185.17 0 top
H122  STAND-OFF  [STAND-OFF]  29.72,164.85 0 top
H123  STAND-OFF  [STAND-OFF]  9.4,185.17 0 top
H124  STAND-OFF  [STAND-OFF]  9.4,164.85 0 top
H125  STAND-OFF  [STAND-OFF]  55.63,185.17 0 top
H126  STAND-OFF  [STAND-OFF]  55.63,164.85 0 top
H127  STAND-OFF  [STAND-OFF]  35.31,185.17 0 top
H128  STAND-OFF  [STAND-OFF]  35.31,164.85 0 top
H129  STAND-OFF  [STAND-OFF]  81.53,185.17 0 top
H130  STAND-OFF  [STAND-OFF]  81.53,164.85 0 top
H131  STAND-OFF  [STAND-OFF]  61.21,185.17 0 top
H132  STAND-OFF  [STAND-OFF]  61.21,164.85 0 top
H133  STAND-OFF  [STAND-OFF]  107.44,185.17 0 top
H134  STAND-OFF  [STAND-OFF]  107.44,164.85 0 top
H135  STAND-OFF  [STAND-OFF]  87.12,185.17 0 top
H136  STAND-OFF  [STAND-OFF]  87.12,164.85 0 top
H137  STAND-OFF  [STAND-OFF]  133.35,185.17 0 top
H138  STAND-OFF  [STAND-OFF]  133.35,164.85 0 top
H139  STAND-OFF  [STAND-OFF]  113.03,185.17 0 top
H140  STAND-OFF  [STAND-OFF]  113.03,164.85 0 top
J1  [SCREWTERMINAL-3.5MM-4]  28.7,14.35 90 top
J2  [1X05_NO_SILK]  8.13,14.48 90 top
J3  POWER_JACK  [POWER_JACK_PTH_SLOT]  19.56,8.25 270 top
J4  [SCREWTERMINAL-3.5MM-4]  54.61,14.35 90 top
J5  [1X05_NO_SILK]  34.04,14.48 90 top
J6  POWER_JACK  [POWER_JACK_PTH_SLOT]  45.47,8.25 270 top
J7  [SCREWTERMINAL-3.5MM-4]  80.52,14.35 90 top
J8  [1X05_NO_SILK]  59.94,14.48 90 top
J9  POWER_JACK  [POWER_JACK_PTH_SLOT]  71.37,8.25 270 top
J10  [SCREWTERMINAL-3.5MM-4]  106.43,14.35 90 top
J11  [1X05_NO_SILK]  85.85,14.48 90 top
J12  POWER_JACK  [POWER_JACK_PTH_SLOT]  97.28,8.25 270 top
J13  [SCREWTERMINAL-3.5MM-4]  132.33,14.35 90 top
J14  [1X05_NO_SILK]  111.76,14.48 90 top
J15  POWER_JACK  [POWER_JACK_PTH_SLOT]  123.19,8.25 270 top
J16  [SCREWTERMINAL-3.5MM-4]  28.7,40.26 90 top
J17  [1X05_NO_SILK]  8.13,40.39 90 top
J18  POWER_JACK  [POWER_JACK_PTH_SLOT]  19.56,34.16 270 top
J19  [SCREWTERMINAL-3.5MM-4]  54.61,40.26 90 top
J20  [1X05_NO_SILK]  34.04,40.39 90 top
J21  POWER_JACK  [POWER_JACK_PTH_SLOT]  45.47,34.16 270 top
J22  [SCREWTERMINAL-3.5MM-4]  80.52,40.26 90 top
J23  [1X05_NO_SILK]  59.94,40.39 90 top
J24  POWER_JACK  [POWER_JACK_PTH_SLOT]  71.37,34.16 270 top
J25  [SCREWTERMINAL-3.5MM-4]  106.43,40.26 90 top
J26  [1X05_NO_SILK]  85.85,40.39 90 top
J27  POWER_JACK  [POWER_JACK_PTH_SLOT]  97.28,34.16 270 top
J28  [SCREWTERMINAL-3.5MM-4]  132.33,40.26 90 top
J29  [1X05_NO_SILK]  111.76,40.39 90 top
J30  POWER_JACK  [POWER_JACK_PTH_SLOT]  123.19,34.16 270 top
J31  [SCREWTERMINAL-3.5MM-4]  28.7,66.17 90 top
J32  [1X05_NO_SILK]  8.13,66.29 90 top
J33  POWER_JACK  [POWER_JACK_PTH_SLOT]  19.56,60.07 270 top
J34  [SCREWTERMINAL-3.5MM-4]  54.61,66.17 90 top
J35  [1X05_NO_SILK]  34.04,66.29 90 top
J36  POWER_JACK  [POWER_JACK_PTH_SLOT]  45.47,60.07 270 top
J37  [SCREWTERMINAL-3.5MM-4]  80.52,66.17 90 top
J38  [1X05_NO_SILK]  59.94,66.29 90 top
J39  POWER_JACK  [POWER_JACK_PTH_SLOT]  71.37,60.07 270 top
J40  [SCREWTERMINAL-3.5MM-4]  106.43,66.17 90 top
J41  [1X05_NO_SILK]  85.85,66.29 90 top
J42  POWER_JACK  [POWER_JACK_PTH_SLOT]  97.28,60.07 270 top
J43  [SCREWTERMINAL-3.5MM-4]  132.33,66.17 90 top
J44  [1X05_NO_SILK]  111.76,66.29 90 top
J45  POWER_JACK  [POWER_JACK_PTH_SLOT]  123.19,60.07 270 top
J46  [SCREWTERMINAL-3.5MM-4]  28.7,92.08 90 top
J47  [1X05_NO_SILK]  8.13,92.2 90 top
J48  POWER_JACK  [POWER_JACK_PTH_SLOT]  19.56,85.98 270 top
J49  [SCREWTERMINAL-3.5MM-4]  54.61,92.08 90 top
J50  [1X05_NO_SILK]  34.04,92.2 90 top
J51  POWER_JACK  [POWER_JACK_PTH_SLOT]  45.47,85.98 270 top
J52  [SCREWTERMINAL-3.5MM-4]  80.52,92.08 90 top
J53  [1X05_NO_SILK]  59.94,92.2 90 top
J54  POWER_JACK  [POWER_JACK_PTH_SLOT]  71.37,85.98 270 top
J55  [SCREWTERMINAL-3.5MM-4]  106.43,92.08 90 top
J56  [1X05_NO_SILK]  85.85,92.2 90 top
J57  POWER_JACK  [POWER_JACK_PTH_SLOT]  97.28,85.98 270 top
J58  [SCREWTERMINAL-3.5MM-4]  132.33,92.08 90 top
J59  [1X05_NO_SILK]  111.76,92.2 90 top
J60  POWER_JACK  [POWER_JACK_PTH_SLOT]  123.19,85.98 270 top
J61  [SCREWTERMINAL-3.5MM-4]  28.7,117.98 90 top
J62  [1X05_NO_SILK]  8.13,118.11 90 top
J63  POWER_JACK  [POWER_JACK_PTH_SLOT]  19.56,111.89 270 top
J64  [SCREWTERMINAL-3.5MM-4]  54.61,117.98 90 top
J65  [1X05_NO_SILK]  34.04,118.11 90 top
J66  POWER_JACK  [POWER_JACK_PTH_SLOT]  45.47,111.89 270 top
J67  [SCREWTERMINAL-3.5MM-4]  80.52,117.98 90 top
J68  [1X05_NO_SILK]  59.94,118.11 90 top
J69  POWER_JACK  [POWER_JACK_PTH_SLOT]  71.37,111.89 270 top
J70  [SCREWTERMINAL-3.5MM-4]  106.43,117.98 90 top
J71  [1X05_NO_SILK]  85.85,118.11 90 top
J72  POWER_JACK  [POWER_JACK_PTH_SLOT]  97.28,111.89 270 top
J73  [SCREWTERMINAL-3.5MM-4]  132.33,117.98 90 top
J74  [1X05_NO_SILK]  111.76,118.11 90 top
J75  POWER_JACK  [POWER_JACK_PTH_SLOT]  123.19,111.89 270 top
J76  [SCREWTERMINAL-3.5MM-4]  28.7,143.89 90 top
J77  [1X05_NO_SILK]  8.13,144.02 90 top
J78  POWER_JACK  [POWER_JACK_PTH_SLOT]  19.56,137.8 270 top
J79  [SCREWTERMINAL-3.5MM-4]  54.61,143.89 90 top
J80  [1X05_NO_SILK]  34.04,144.02 90 top
J81  POWER_JACK  [POWER_JACK_PTH_SLOT]  45.47,137.8 270 top
J82  [SCREWTERMINAL-3.5MM-4]  80.52,143.89 90 top
J83  [1X05_NO_SILK]  59.94,144.02 90 top
J84  POWER_JACK  [POWER_JACK_PTH_SLOT]  71.37,137.8 270 top
J85  [SCREWTERMINAL-3.5MM-4]  106.43,143.89 90 top
J86  [1X05_NO_SILK]  85.85,144.02 90 top
J87  POWER_JACK  [POWER_JACK_PTH_SLOT]  97.28,137.8 270 top
J88  [SCREWTERMINAL-3.5MM-4]  132.33,143.89 90 top
J89  [1X05_NO_SILK]  111.76,144.02 90 top
J90  POWER_JACK  [POWER_JACK_PTH_SLOT]  123.19,137.8 270 top
J91  [SCREWTERMINAL-3.5MM-4]  28.7,169.8 90 top
J92  [1X05_NO_SILK]  8.13,169.93 90 top
J93  POWER_JACK  [POWER_JACK_PTH_SLOT]  19.56,163.7 270 top
J94  [SCREWTERMINAL-3.5MM-4]  54.61,169.8 90 top
J95  [1X05_NO_SILK]  34.04,169.93 90 top
J96  POWER_JACK  [POWER_JACK_PTH_SLOT]  45.47,163.7 270 top
J97  [SCREWTERMINAL-3.5MM-4]  80.52,169.8 90 top
J98  [1X05_NO_SILK]  59.94,169.93 90 top
J99  POWER_JACK  [POWER_JACK_PTH_SLOT]  71.37,163.7 270 top
J100  [SCREWTERMINAL-3.5MM-4]  106.43,169.8 90 top
J101  [1X05_NO_SILK]  85.85,169.93 90 top
J102  POWER_JACK  [POWER_JACK_PTH_SLOT]  97.28,163.7 270 top
J103  [SCREWTERMINAL-3.5MM-4]  132.33,169.8 90 top
J104  [1X05_NO_SILK]  111.76,169.93 90 top
J105  POWER_JACK  [POWER_JACK_PTH_SLOT]  123.19,163.7 270 top
L1  4.7μH  [INDUCTOR_4X4MM]  20.57,23.75 90 top
L2  4.7μH  [INDUCTOR_4X4MM]  46.48,23.75 90 top
L3  4.7μH  [INDUCTOR_4X4MM]  72.39,23.75 90 top
L4  4.7μH  [INDUCTOR_4X4MM]  98.3,23.75 90 top
L5  4.7μH  [INDUCTOR_4X4MM]  124.21,23.75 90 top
L6  4.7μH  [INDUCTOR_4X4MM]  20.57,49.66 90 top
L7  4.7μH  [INDUCTOR_4X4MM]  46.48,49.66 90 top
L8  4.7μH  [INDUCTOR_4X4MM]  72.39,49.66 90 top
L9  4.7μH  [INDUCTOR_4X4MM]  98.3,49.66 90 top
L10  4.7μH  [INDUCTOR_4X4MM]  124.21,49.66 90 top
L11  4.7μH  [INDUCTOR_4X4MM]  20.57,75.56 90 top
L12  4.7μH  [INDUCTOR_4X4MM]  46.48,75.56 90 top
L13  4.7μH  [INDUCTOR_4X4MM]  72.39,75.56 90 top
L14  4.7μH  [INDUCTOR_4X4MM]  98.3,75.56 90 top
L15  4.7μH  [INDUCTOR_4X4MM]  124.21,75.56 90 top
L16  4.7μH  [INDUCTOR_4X4MM]  20.57,101.47 90 top
L17  4.7μH  [INDUCTOR_4X4MM]  46.48,101.47 90 top
L18  4.7μH  [INDUCTOR_4X4MM]  72.39,101.47 90 top
L19  4.7μH  [INDUCTOR_4X4MM]  98.3,101.47 90 top
L20  4.7μH  [INDUCTOR_4X4MM]  124.21,101.47 90 top
L21  4.7μH  [INDUCTOR_4X4MM]  20.57,127.38 90 top
L22  4.7μH  [INDUCTOR_4X4MM]  46.48,127.38 90 top
L23  4.7μH  [INDUCTOR_4X4MM]  72.39,127.38 90 top
L24  4.7μH  [INDUCTOR_4X4MM]  98.3,127.38 90 top
L25  4.7μH  [INDUCTOR_4X4MM]  124.21,127.38 90 top
L26  4.7μH  [INDUCTOR_4X4MM]  20.57,153.29 90 top
L27  4.7μH  [INDUCTOR_4X4MM]  46.48,153.29 90 top
L28  4.7μH  [INDUCTOR_4X4MM]  72.39,153.29 90 top
L29  4.7μH  [INDUCTOR_4X4MM]  98.3,153.29 90 top
L30  4.7μH  [INDUCTOR_4X4MM]  124.21,153.29 90 top
L31  4.7μH  [INDUCTOR_4X4MM]  20.57,179.2 90 top
L32  4.7μH  [INDUCTOR_4X4MM]  46.48,179.2 90 top
L33  4.7μH  [INDUCTOR_4X4MM]  72.39,179.2 90 top
L34  4.7μH  [INDUCTOR_4X4MM]  98.3,179.2 90 top
L35  4.7μH  [INDUCTOR_4X4MM]  124.21,179.2 90 top
LOGO1  SFE_LOGO_NAME_FLAME.1_INCH  [SFE_LOGO_NAME_FLAME_.1]  19.56,27.81 0 bottom
LOGO2  OSHW-LOGOS  [OSHW-LOGO-S]  19.56,11.05 0 bottom
LOGO3  SFE_LOGO_NAME_FLAME.1_INCH  [SFE_LOGO_NAME_FLAME_.1]  45.47,27.81 0 bottom
LOGO4  OSHW-LOGOS  [OSHW-LOGO-S]  45.47,11.05 0 bottom
LOGO5  SFE_LOGO_NAME_FLAME.1_INCH  [SFE_LOGO_NAME_FLAME_.1]  71.37,27.81 0 bottom
LOGO6  OSHW-LOGOS  [OSHW-LOGO-S]  71.37,11.05 0 bottom
LOGO7  SFE_LOGO_NAME_FLAME.1_INCH  [SFE_LOGO_NAME_FLAME_.1]  97.28,27.81 0 bottom
LOGO8  OSHW-LOGOS  [OSHW-LOGO-S]  97.28,11.05 0 bottom
LOGO9  SFE_LOGO_NAME_FLAME.1_INCH  [SFE_LOGO_NAME_FLAME_.1]  123.19,27.81 0 bottom
LOGO10  OSHW-LOGOS  [OSHW-LOGO-S]  123.19,11.05 0 bottom
LOGO11  SFE_LOGO_NAME_FLAME.1_INCH  [SFE_LOGO_NAME_FLAME_.1]  19.56,53.72 0 bottom
LOGO12  OSHW-LOGOS  [OSHW-LOGO-S]  19.56,36.96 0 bottom
LOGO13  SFE_LOGO_NAME_FLAME.1_INCH  [SFE_LOGO_NAME_FLAME_.1]  45.47,53.72 0 bottom
LOGO14  OSHW-LOGOS  [OSHW-LOGO-S]  45.47,36.96 0 bottom
LOGO15  SFE_LOGO_NAME_FLAME.1_INCH  [SFE_LOGO_NAME_FLAME_.1]  71.37,53.72 0 bottom
LOGO16  OSHW-LOGOS  [OSHW-LOGO-S]  71.37,36.96 0 bottom
LOGO17  SFE_LOGO_NAME_FLAME.1_INCH  [SFE_LOGO_NAME_FLAME_.1]  97.28,53.72 0 bottom
LOGO18  OSHW-LOGOS  [OSHW-LOGO-S]  97.28,36.96 0 bottom
LOGO19  SFE_LOGO_NAME_FLAME.1_INCH  [SFE_LOGO_NAME_FLAME_.1]  123.19,53.72 0 bottom
LOGO20  OSHW-LOGOS  [OSHW-LOGO-S]  123.19,36.96 0 bottom
LOGO21  SFE_LOGO_NAME_FLAME.1_INCH  [SFE_LOGO_NAME_FLAME_.1]  19.56,79.63 0 bottom
LOGO22  OSHW-LOGOS  [OSHW-LOGO-S]  19.56,62.86 0 bottom
LOGO23  SFE_LOGO_NAME_FLAME.1_INCH  [SFE_LOGO_NAME_FLAME_.1]  45.47,79.63 0 bottom
LOGO24  OSHW-LOGOS  [OSHW-LOGO-S]  45.47,62.86 0 bottom
LOGO25  SFE_LOGO_NAME_FLAME.1_INCH  [SFE_LOGO_NAME_FLAME_.1]  71.37,79.63 0 bottom
LOGO26  OSHW-LOGOS  [OSHW-LOGO-S]  71.37,62.86 0 bottom
LOGO27  SFE_LOGO_NAME_FLAME.1_INCH  [SFE_LOGO_NAME_FLAME_.1]  97.28,79.63 0 bottom
LOGO28  OSHW-LOGOS  [OSHW-LOGO-S]  97.28,62.86 0 bottom
LOGO29  SFE_LOGO_NAME_FLAME.1_INCH  [SFE_LOGO_NAME_FLAME_.1]  123.19,79.63 0 bottom
LOGO30  OSHW-LOGOS  [OSHW-LOGO-S]  123.19,62.86 0 bottom
LOGO31  SFE_LOGO_NAME_FLAME.1_INCH  [SFE_LOGO_NAME_FLAME_.1]  19.56,105.54 0 bottom
LOGO32  OSHW-LOGOS  [OSHW-LOGO-S]  19.56,88.77 0 bottom
LOGO33  SFE_LOGO_NAME_FLAME.1_INCH  [SFE_LOGO_NAME_FLAME_.1]  45.47,105.54 0 bottom
LOGO34  OSHW-LOGOS  [OSHW-LOGO-S]  45.47,88.77 0 bottom
LOGO35  SFE_LOGO_NAME_FLAME.1_INCH  [SFE_LOGO_NAME_FLAME_.1]  71.37,105.54 0 bottom
LOGO36  OSHW-LOGOS  [OSHW-LOGO-S]  71.37,88.77 0 bottom
LOGO37  SFE_LOGO_NAME_FLAME.1_INCH  [SFE_LOGO_NAME_FLAME_.1]  97.28,105.54 0 bottom
LOGO38  OSHW-LOGOS  [OSHW-LOGO-S]  97.28,88.77 0 bottom
LOGO39  SFE_LOGO_NAME_FLAME.1_INCH  [SFE_LOGO_NAME_FLAME_.1]  123.19,105.54 0 bottom
LOGO40  OSHW-LOGOS  [OSHW-LOGO-S]  123.19,88.77 0 bottom
LOGO41  SFE_LOGO_NAME_FLAME.1_INCH  [SFE_LOGO_NAME_FLAME_.1]  19.56,131.44 0 bottom
LOGO42  OSHW-LOGOS  [OSHW-LOGO-S]  19.56,114.68 0 bottom
LOGO43  SFE_LOGO_NAME_FLAME.1_INCH  [SFE_LOGO_NAME_FLAME_.1]  45.47,131.44 0 bottom
LOGO44  OSHW-LOGOS  [OSHW-LOGO-S]  45.47,114.68 0 bottom
LOGO45  SFE_LOGO_NAME_FLAME.1_INCH  [SFE_LOGO_NAME_FLAME_.1]  71.37,131.44 0 bottom
LOGO46  OSHW-LOGOS  [OSHW-LOGO-S]  71.37,114.68 0 bottom
LOGO47  SFE_LOGO_NAME_FLAME.1_INCH  [SFE_LOGO_NAME_FLAME_.1]  97.28,131.44 0 bottom
LOGO48  OSHW-LOGOS  [OSHW-LOGO-S]  97.28,114.68 0 bottom
LOGO49  SFE_LOGO_NAME_FLAME.1_INCH  [SFE_LOGO_NAME_FLAME_.1]  123.19,131.44 0 bottom
LOGO50  OSHW-LOGOS  [OSHW-LOGO-S]  123.19,114.68 0 bottom
LOGO51  SFE_LOGO_NAME_FLAME.1_INCH  [SFE_LOGO_NAME_FLAME_.1]  19.56,157.35 0 bottom
LOGO52  OSHW-LOGOS  [OSHW-LOGO-S]  19.56,140.59 0 bottom
LOGO53  SFE_LOGO_NAME_FLAME.1_INCH  [SFE_LOGO_NAME_FLAME_.1]  45.47,157.35 0 bottom
LOGO54  OSHW-LOGOS  [OSHW-LOGO-S]  45.47,140.59 0 bottom
LOGO55  SFE_LOGO_NAME_FLAME.1_INCH  [SFE_LOGO_NAME_FLAME_.1]  71.37,157.35 0 bottom
LOGO56  OSHW-LOGOS  [OSHW-LOGO-S]  71.37,140.59 0 bottom
LOGO57  SFE_LOGO_NAME_FLAME.1_INCH  [SFE_LOGO_NAME_FLAME_.1]  97.28,157.35 0 bottom
LOGO58  OSHW-LOGOS  [OSHW-LOGO-S]  97.28,140.59 0 bottom
LOGO59  SFE_LOGO_NAME_FLAME.1_INCH  [SFE_LOGO_NAME_FLAME_.1]  123.19,157.35 0 bottom
LOGO60  OSHW-LOGOS  [OSHW-LOGO-S]  123.19,140.59 0 bottom
LOGO61  SFE_LOGO_NAME_FLAME.1_INCH  [SFE_LOGO_NAME_FLAME_.1]  19.56,183.26 0 bottom
LOGO62  OSHW-LOGOS  [OSHW-LOGO-S]  19.56,166.5 0 bottom
LOGO63  SFE_LOGO_NAME_FLAME.1_INCH  [SFE_LOGO_NAME_FLAME_.1]  45.47,183.26 0 bottom
LOGO64  OSHW-LOGOS  [OSHW-LOGO-S]  45.47,166.5 0 bottom
LOGO65  SFE_LOGO_NAME_FLAME.1_INCH  [SFE_LOGO_NAME_FLAME_.1]  71.37,183.26 0 bottom
LOGO66  OSHW-LOGOS  [OSHW-LOGO-S]  71.37,166.5 0 bottom
LOGO67  SFE_LOGO_NAME_FLAME.1_INCH  [SFE_LOGO_NAME_FLAME_.1]  97.28,183.26 0 bottom
LOGO68  OSHW-LOGOS  [OSHW-LOGO-S]  97.28,166.5 0 bottom
LOGO69  SFE_LOGO_NAME_FLAME.1_INCH  [SFE_LOGO_NAME_FLAME_.1]  123.19,183.26 0 bottom
LOGO70  OSHW-LOGOS  [OSHW-LOGO-S]  123.19,166.5 0 bottom
PWR  [SMT-JUMPER_2_NC_TRACE_SILK]  22.35,21.08 90 bottom
PWR1  [SMT-JUMPER_2_NC_TRACE_SILK]  48.26,21.08 90 bottom
PWR2  [SMT-JUMPER_2_NC_TRACE_SILK]  74.17,21.08 90 bottom
PWR3  [SMT-JUMPER_2_NC_TRACE_SILK]  100.08,21.08 90 bottom
PWR4  [SMT-JUMPER_2_NC_TRACE_SILK]  125.98,21.08 90 bottom
PWR5  [SMT-JUMPER_2_NC_TRACE_SILK]  22.35,46.99 90 bottom
PWR6  [SMT-JUMPER_2_NC_TRACE_SILK]  48.26,46.99 90 bottom
PWR7  [SMT-JUMPER_2_NC_TRACE_SILK]  74.17,46.99 90 bottom
PWR8  [SMT-JUMPER_2_NC_TRACE_SILK]  100.08,46.99 90 bottom
PWR9  [SMT-JUMPER_2_NC_TRACE_SILK]  125.98,46.99 90 bottom
PWR10  [SMT-JUMPER_2_NC_TRACE_SILK]  22.35,72.9 90 bottom
PWR11  [SMT-JUMPER_2_NC_TRACE_SILK]  48.26,72.9 90 bottom
PWR12  [SMT-JUMPER_2_NC_TRACE_SILK]  74.17,72.9 90 bottom
PWR13  [SMT-JUMPER_2_NC_TRACE_SILK]  100.08,72.9 90 bottom
PWR14  [SMT-JUMPER_2_NC_TRACE_SILK]  125.98,72.9 90 bottom
PWR15  [SMT-JUMPER_2_NC_TRACE_SILK]  22.35,98.81 90 bottom
PWR16  [SMT-JUMPER_2_NC_TRACE_SILK]  48.26,98.81 90 bottom
PWR17  [SMT-JUMPER_2_NC_TRACE_SILK]  74.17,98.81 90 bottom
PWR18  [SMT-JUMPER_2_NC_TRACE_SILK]  100.08,98.81 90 bottom
PWR19  [SMT-JUMPER_2_NC_TRACE_SILK]  125.98,98.81 90 bottom
PWR20  [SMT-JUMPER_2_NC_TRACE_SILK]  22.35,124.71 90 bottom
PWR21  [SMT-JUMPER_2_NC_TRACE_SILK]  48.26,124.71 90 bottom
PWR22  [SMT-JUMPER_2_NC_TRACE_SILK]  74.17,124.71 90 bottom
PWR23  [SMT-JUMPER_2_NC_TRACE_SILK]  100.08,124.71 90 bottom
PWR24  [SMT-JUMPER_2_NC_TRACE_SILK]  125.98,124.71 90 bottom
PWR25  [SMT-JUMPER_2_NC_TRACE_SILK]  22.35,150.62 90 bottom
PWR26  [SMT-JUMPER_2_NC_TRACE_SILK]  48.26,150.62 90 bottom
PWR27  [SMT-JUMPER_2_NC_TRACE_SILK]  74.17,150.62 90 bottom
PWR28  [SMT-JUMPER_2_NC_TRACE_SILK]  100.08,150.62 90 bottom
PWR29  [SMT-JUMPER_2_NC_TRACE_SILK]  125.98,150.62 90 bottom
PWR30  [SMT-JUMPER_2_NC_TRACE_SILK]  22.35,176.53 90 bottom
PWR31  [SMT-JUMPER_2_NC_TRACE_SILK]  48.26,176.53 90 bottom
PWR32  [SMT-JUMPER_2_NC_TRACE_SILK]  74.17,176.53 90 bottom
PWR33  [SMT-JUMPER_2_NC_TRACE_SILK]  100.08,176.53 90 bottom
PWR34  [SMT-JUMPER_2_NC_TRACE_SILK]  125.98,176.53 90 bottom
R1  100k  [0603]  14.48,17.4 180 top
R2  100k  [0603]  17.78,17.4 180 top
R3  1k  [0603]  23.88,18.29 90 top
R4  100k  [0603]  40.39,17.4 180 top
R5  100k  [0603]  43.69,17.4 180 top
R6  1k  [0603]  49.78,18.29 90 top
R7  100k  [0603]  66.29,17.4 180 top
R8  100k  [0603]  69.6,17.4 180 top
R9  1k  [0603]  75.69,18.29 90 top
R10  100k  [0603]  92.2,17.4 180 top
R11  100k  [0603]  95.5,17.4 180 top
R12  1k  [0603]  101.6,18.29 90 top
R13  100k  [0603]  118.11,17.4 180 top
R14  100k  [0603]  121.41,17.4 180 top
R15  1k  [0603]  127.51,18.29 90 top
R16  100k  [0603]  14.48,43.31 180 top
R17  100k  [0603]  17.78,43.31 180 top
R18  1k  [0603]  23.88,44.2 90 top
R19  100k  [0603]  40.39,43.31 180 top
R20  100k  [0603]  43.69,43.31 180 top
R21  1k  [0603]  49.78,44.2 90 top
R22  100k  [0603]  66.29,43.31 180 top
R23  100k  [0603]  69.6,43.31 180 top
R24  1k  [0603]  75.69,44.2 90 top
R25  100k  [0603]  92.2,43.31 180 top
R26  100k  [0603]  95.5,43.31 180 top
R27  1k  [0603]  101.6,44.2 90 top
R28  100k  [0603]  118.11,43.31 180 top
R29  100k  [0603]  121.41,43.31 180 top
R30  1k  [0603]  127.51,44.2 90 top
R31  100k  [0603]  14.48,69.22 180 top
R32  100k  [0603]  17.78,69.22 180 top
R33  1k  [0603]  23.88,70.1 90 top
R34  100k  [0603]  40.39,69.22 180 top
R35  100k  [0603]  43.69,69.22 180 top
R36  1k  [0603]  49.78,70.1 90 top
R37  100k  [0603]  66.29,69.22 180 top
R38  100k  [0603]  69.6,69.22 180 top
R39  1k  [0603]  75.69,70.1 90 top
R40  100k  [0603]  92.2,69.22 180 top
R41  100k  [0603]  95.5,69.22 180 top
R42  1k  [0603]  101.6,70.1 90 top
R43  100k  [0603]  118.11,69.22 180 top
R44  100k  [0603]  121.41,69.22 180 top
R45  1k  [0603]  127.51,70.1 90 top
R46  100k  [0603]  14.48,95.12 180 top
R47  100k  [0603]  17.78,95.12 180 top
R48  1k  [0603]  23.88,96.01 90 top
R49  100k  [0603]  40.39,95.12 180 top
R50  100k  [0603]  43.69,95.12 180 top
R51  1k  [0603]  49.78,96.01 90 top
R52  100k  [0603]  66.29,95.12 180 top
R53  100k  [0603]  69.6,95.12 180 top
R54  1k  [0603]  75.69,96.01 90 top
R55  100k  [0603]  92.2,95.12 180 top
R56  100k  [0603]  95.5,95.12 180 top
R57  1k  [0603]  101.6,96.01 90 top
R58  100k  [0603]  118.11,95.12 180 top
R59  100k  [0603]  121.41,95.12 180 top
R60  1k  [0603]  127.51,96.01 90 top
R61  100k  [0603]  14.48,121.03 180 top
R62  100k  [0603]  17.78,121.03 180 top
R63  1k  [0603]  23.88,121.92 90 top
R64  100k  [0603]  40.39,121.03 180 top
R65  100k  [0603]  43.69,121.03 180 top
R66  1k  [0603]  49.78,121.92 90 top
R67  100k  [0603]  66.29,121.03 180 top
R68  100k  [0603]  69.6,121.03 180 top
R69  1k  [0603]  75.69,121.92 90 top
R70  100k  [0603]  92.2,121.03 180 top
R71  100k  [0603]  95.5,121.03 180 top
R72  1k  [0603]  101.6,121.92 90 top
R73  100k  [0603]  118.11,121.03 180 top
R74  100k  [0603]  121.41,121.03 180 top
R75  1k  [0603]  127.51,121.92 90 top
R76  100k  [0603]  14.48,146.94 180 top
R77  100k  [0603]  17.78,146.94 180 top
R78  1k  [0603]  23.88,147.83 90 top
R79  100k  [0603]  40.39,146.94 180 top
R80  100k  [0603]  43.69,146.94 180 top
R81  1k  [0603]  49.78,147.83 90 top
R82  100k  [0603]  66.29,146.94 180 top
R83  100k  [0603]  69.6,146.94 180 top
R84  1k  [0603]  75.69,147.83 90 top
R85  100k  [0603]  92.2,146.94 180 top
R86  100k  [0603]  95.5,146.94 180 top
R87  1k  [0603]  101.6,147.83 90 top
R88  100k  [0603]  118.11,146.94 180 top
R89  100k  [0603]  121.41,146.94 180 top
R90  1k  [0603]  127.51,147.83 90 top
R91  100k  [0603]  14.48,172.85 180 top
R92  100k  [0603]  17.78,172.85 180 top
R93  1k  [0603]  23.88,173.74 90 top
R94  100k  [0603]  40.39,172.85 180 top
R95  100k  [0603]  43.69,172.85 180 top
R96  1k  [0603]  49.78,173.74 90 top
R97  100k  [0603]  66.29,172.85 180 top
R98  100k  [0603]  69.6,172.85 180 top
R99  1k  [0603]  75.69,173.74 90 top
R100  100k  [0603]  92.2,172.85 180 top
R101  100k  [0603]  95.5,172.85 180 top
R102  1k  [0603]  101.6,173.74 90 top
R103  100k  [0603]  118.11,172.85 180 top
R104  100k  [0603]  121.41,172.85 180 top
R105  1k  [0603]  127.51,173.74 90 top
U1  AP63203  [SOT23-6]  14.99,22.99 270 top
U2  AP63203  [SOT23-6]  40.89,22.99 270 top
U3  AP63203  [SOT23-6]  66.8,22.99 270 top
U4  AP63203  [SOT23-6]  92.71,22.99 270 top
U5  AP63203  [SOT23-6]  118.62,22.99 270 top
U6  AP63203  [SOT23-6]  14.99,48.89 270 top
U7  AP63203  [SOT23-6]  40.89,48.89 270 top
U8  AP63203  [SOT23-6]  66.8,48.89 270 top
U9  AP63203  [SOT23-6]  92.71,48.89 270 top
U10  AP63203  [SOT23-6]  118.62,48.89 270 top
U11  AP63203  [SOT23-6]  14.99,74.8 270 top
U12  AP63203  [SOT23-6]  40.89,74.8 270 top
U13  AP63203  [SOT23-6]  66.8,74.8 270 top
U14  AP63203  [SOT23-6]  92.71,74.8 270 top
U15  AP63203  [SOT23-6]  118.62,74.8 270 top
U16  AP63203  [SOT23-6]  14.99,100.71 270 top
U17  AP63203  [SOT23-6]  40.89,100.71 270 top
U18  AP63203  [SOT23-6]  66.8,100.71 270 top
U19  AP63203  [SOT23-6]  92.71,100.71 270 top
U20  AP63203  [SOT23-6]  118.62,100.71 270 top
U21  AP63203  [SOT23-6]  14.99,126.62 270 top
U22  AP63203  [SOT23-6]  40.89,126.62 270 top
U23  AP63203  [SOT23-6]  66.8,126.62 270 top
U24  AP63203  [SOT23-6]  92.71,126.62 270 top
U25  AP63203  [SOT23-6]  118.62,126.62 270 top
U26  AP63203  [SOT23-6]  14.99,152.53 270 top
U27  AP63203  [SOT23-6]  40.89,152.53 270 top
U28  AP63203  [SOT23-6]  66.8,152.53 270 top
U29  AP63203  [SOT23-6]  92.71,152.53 270 top
U30  AP63203  [SOT23-6]  118.62,152.53 270 top
U31  AP63203  [SOT23-6]  14.99,178.44 270 top
U32  AP63203  [SOT23-6]  40.89,178.44 270 top
U33  AP63203  [SOT23-6]  66.8,178.44 270 top
U34  AP63203  [SOT23-6]  92.71,178.44 270 top
U35  AP63203  [SOT23-6]  118.62,178.44 270 top
U$1  [#3V3#0]  8.64,24.64 0 top
U$2  [#3V3#0]  28.19,24.77 0 bottom
U$3  [#GND#0]  8.64,19.56 0 top
U$4  [#GND#0]  28.19,21.34 0 bottom
U$5  [#GND#0]  28.19,17.78 0 bottom
U$6  [#VIN#0]  8.64,17.02 0 top
U$7  [#EN#0]  8.64,14.48 0 top
U$8  [#VIN#0]  28.19,14.35 0 bottom
U$9  [#3V8_#_32V#0]  17.4,17.02 0 bottom
U$10  [#GND#0]  8.64,22.1 0 top
U$11  [#GND#0]  13.08,19.56 0 bottom
U$12  [#GND#0]  13.08,22.1 0 bottom
U$13  [#3V3#0]  13.08,24.64 0 bottom
U$14  [#EN#0]  11.94,14.48 0 bottom
U$15  [BUCK_REGULATOR0]  17.78,30.23 0 top
U$16  [#LED#0]  22.35,20.19 270 bottom
U$17  [SFE_LOGO_FLAME_.1]  25.27,30.48 0 top
U$18  [PWR1]  19.05,16.13 0 top
U$19  [#3V3#0]  34.54,24.64 0 top
U$20  [AP632030]  15.49,28.45 0 top
U$21  [#3V3#0]  54.1,24.77 0 bottom
U$22  [#GND#0]  34.54,19.56 0 top
U$23  [#GND#0]  54.1,21.34 0 bottom
U$24  [#GND#0]  54.1,17.78 0 bottom
U$25  [#VIN#0]  34.54,17.02 0 top
U$26  [#EN#0]  34.54,14.48 0 top
U$27  [#3V8_#_32V#0]  43.31,17.02 0 bottom
U$28  [#GND#0]  34.54,22.1 0 top
U$29  [#GND#0]  38.99,19.56 0 bottom
U$30  [#GND#0]  38.99,22.1 0 bottom
U$31  [#3V3#0]  38.99,24.64 0 bottom
U$32  [#EN#0]  37.85,14.48 0 bottom
U$33  [BUCK_REGULATOR0]  43.69,30.23 0 top
U$34  [#VIN#0]  54.1,14.35 0 bottom
U$35  [SFE_LOGO_FLAME_.1]  51.18,30.48 0 top
U$36  [PWR1]  44.96,16.13 0 top
U$37  [AP632030]  41.4,28.45 0 top
U$38  [#LED#0]  48.26,20.19 270 bottom
U$39  [#3V3#0]  60.45,24.64 0 top
U$40  [#3V3#0]  80.01,24.77 0 bottom
U$41  [#GND#0]  60.45,19.56 0 top
U$42  [#GND#0]  80.01,21.34 0 bottom
U$43  [#GND#0]  80.01,17.78 0 bottom
U$44  [#VIN#0]  60.45,17.02 0 top
U$45  [#EN#0]  60.45,14.48 0 top
U$46  [#3V8_#_32V#0]  69.22,17.02 0 bottom
U$47  [#GND#0]  60.45,22.1 0 top
U$48  [#GND#0]  64.9,19.56 0 bottom
U$49  [#GND#0]  64.9,22.1 0 bottom
U$50  [#3V3#0]  64.9,24.64 0 bottom
U$51  [#EN#0]  63.75,14.48 0 bottom
U$52  [BUCK_REGULATOR0]  69.6,30.23 0 top
U$53  [#VIN#0]  80.01,14.35 0 bottom
U$54  [SFE_LOGO_FLAME_.1]  77.09,30.48 0 top
U$55  [PWR1]  70.87,16.13 0 top
U$56  [AP632030]  67.31,28.45 0 top
U$57  [#LED#0]  74.17,20.19 270 bottom
U$58  [#3V3#0]  86.36,24.64 0 top
U$59  [#3V3#0]  105.92,24.77 0 bottom
U$60  [#GND#0]  86.36,19.56 0 top
U$61  [#GND#0]  105.92,21.34 0 bottom
U$62  [#GND#0]  105.92,17.78 0 bottom
U$63  [#VIN#0]  86.36,17.02 0 top
U$64  [#EN#0]  86.36,14.48 0 top
U$65  [#3V8_#_32V#0]  95.12,17.02 0 bottom
U$66  [#GND#0]  86.36,22.1 0 top
U$67  [#GND#0]  90.81,19.56 0 bottom
U$68  [#GND#0]  90.81,22.1 0 bottom
U$69  [#3V3#0]  90.81,24.64 0 bottom
U$70  [#EN#0]  89.66,14.48 0 bottom
U$71  [BUCK_REGULATOR0]  95.5,30.23 0 top
U$72  [#VIN#0]  105.92,14.35 0 bottom
U$73  [SFE_LOGO_FLAME_.1]  103,30.48 0 top
U$74  [PWR1]  96.77,16.13 0 top
U$75  [AP632030]  93.22,28.45 0 top
U$76  [#LED#0]  100.08,20.19 270 bottom
U$77  [#3V3#0]  112.27,24.64 0 top
U$78  [#3V3#0]  131.83,24.77 0 bottom
U$79  [#GND#0]  112.27,19.56 0 top
U$80  [#GND#0]  131.83,21.34 0 bottom
U$81  [#GND#0]  131.83,17.78 0 bottom
U$82  [#VIN#0]  112.27,17.02 0 top
U$83  [#EN#0]  112.27,14.48 0 top
U$84  [#3V8_#_32V#0]  121.03,17.02 0 bottom
U$85  [#GND#0]  112.27,22.1 0 top
U$86  [#GND#0]  116.71,19.56 0 bottom
U$87  [#GND#0]  116.71,22.1 0 bottom
U$88  [#3V3#0]  116.71,24.64 0 bottom
U$89  [#EN#0]  115.57,14.48 0 bottom
U$90  [BUCK_REGULATOR0]  121.41,30.23 0 top
U$91  [#VIN#0]  131.83,14.35 0 bottom
U$92  [SFE_LOGO_FLAME_.1]  128.91,30.48 0 top
U$93  [PWR1]  122.68,16.13 0 top
U$94  [AP632030]  119.13,28.45 0 top
U$95  [#LED#0]  125.98,20.19 270 bottom
U$96  [#3V3#0]  8.64,50.55 0 top
U$97  [#3V3#0]  28.19,50.67 0 bottom
U$98  [#GND#0]  8.64,45.47 0 top
U$99  [#GND#0]  28.19,47.24 0 bottom
U$100  [#GND#0]  28.19,43.69 0 bottom
U$101  [#VIN#0]  8.64,42.93 0 top
U$102  [#EN#0]  8.64,40.39 0 top
U$103  [#3V8_#_32V#0]  17.4,42.93 0 bottom
U$104  [#GND#0]  8.64,48.01 0 top
U$105  [#GND#0]  13.08,45.47 0 bottom
U$106  [#GND#0]  13.08,48.01 0 bottom
U$107  [#3V3#0]  13.08,50.55 0 bottom
U$108  [#EN#0]  11.94,40.39 0 bottom
U$109  [BUCK_REGULATOR0]  17.78,56.13 0 top
U$110  [#VIN#0]  28.19,40.26 0 bottom
U$111  [SFE_LOGO_FLAME_.1]  25.27,56.39 0 top
U$112  [PWR1]  19.05,42.04 0 top
U$113  [AP632030]  15.49,54.36 0 top
U$114  [#LED#0]  22.35,46.1 270 bottom
U$115  [#3V3#0]  34.54,50.55 0 top
U$116  [#3V3#0]  54.1,50.67 0 bottom
U$117  [#GND#0]  34.54,45.47 0 top
U$118  [#GND#0]  54.1,47.24 0 bottom
U$119  [#GND#0]  54.1,43.69 0 bottom
U$120  [#VIN#0]  34.54,42.93 0 top
U$121  [#EN#0]  34.54,40.39 0 top
U$122  [#3V8_#_32V#0]  43.31,42.93 0 bottom
U$123  [#GND#0]  34.54,48.01 0 top
U$124  [#GND#0]  38.99,45.47 0 bottom
U$125  [#GND#0]  38.99,48.01 0 bottom
U$126  [#3V3#0]  38.99,50.55 0 bottom
U$127  [#EN#0]  37.85,40.39 0 bottom
U$128  [BUCK_REGULATOR0]  43.69,56.13 0 top
U$129  [#VIN#0]  54.1,40.26 0 bottom
U$130  [SFE_LOGO_FLAME_.1]  51.18,56.39 0 top
U$131  [PWR1]  44.96,42.04 0 top
U$132  [AP632030]  41.4,54.36 0 top
U$133  [#LED#0]  48.26,46.1 270 bottom
U$134  [#3V3#0]  60.45,50.55 0 top
U$135  [#3V3#0]  80.01,50.67 0 bottom
U$136  [#GND#0]  60.45,45.47 0 top
U$137  [#GND#0]  80.01,47.24 0 bottom
U$138  [#GND#0]  80.01,43.69 0 bottom
U$139  [#VIN#0]  60.45,42.93 0 top
U$140  [#EN#0]  60.45,40.39 0 top
U$141  [#3V8_#_32V#0]  69.22,42.93 0 bottom
U$142  [#GND#0]  60.45,48.01 0 top
U$143  [#GND#0]  64.9,45.47 0 bottom
U$144  [#GND#0]  64.9,48.01 0 bottom
U$145  [#3V3#0]  64.9,50.55 0 bottom
U$146  [#EN#0]  63.75,40.39 0 bottom
U$147  [BUCK_REGULATOR0]  69.6,56.13 0 top
U$148  [#VIN#0]  80.01,40.26 0 bottom
U$149  [SFE_LOGO_FLAME_.1]  77.09,56.39 0 top
U$150  [PWR1]  70.87,42.04 0 top
U$151  [AP632030]  67.31,54.36 0 top
U$152  [#LED#0]  74.17,46.1 270 bottom
U$153  [#3V3#0]  86.36,50.55 0 top
U$154  [#3V3#0]  105.92,50.67 0 bottom
U$155  [#GND#0]  86.36,45.47 0 top
U$156  [#GND#0]  105.92,47.24 0 bottom
U$157  [#GND#0]  105.92,43.69 0 bottom